# Altium PCB DSP_Control.PcbDoc (part 1 of 2)
Units mm, origin at the board's own origin, x right, y up, seen from the top; angles counter-clockwise.
Board outline 100 x 70 mm, 4 copper layers (Top Layer, GND, PWR, Bottom Layer), stack 0.603 mm thick; 225 components, 118 nets, 552 pads, 173 vias.
Unrouted connection lines stored in the file: 3.
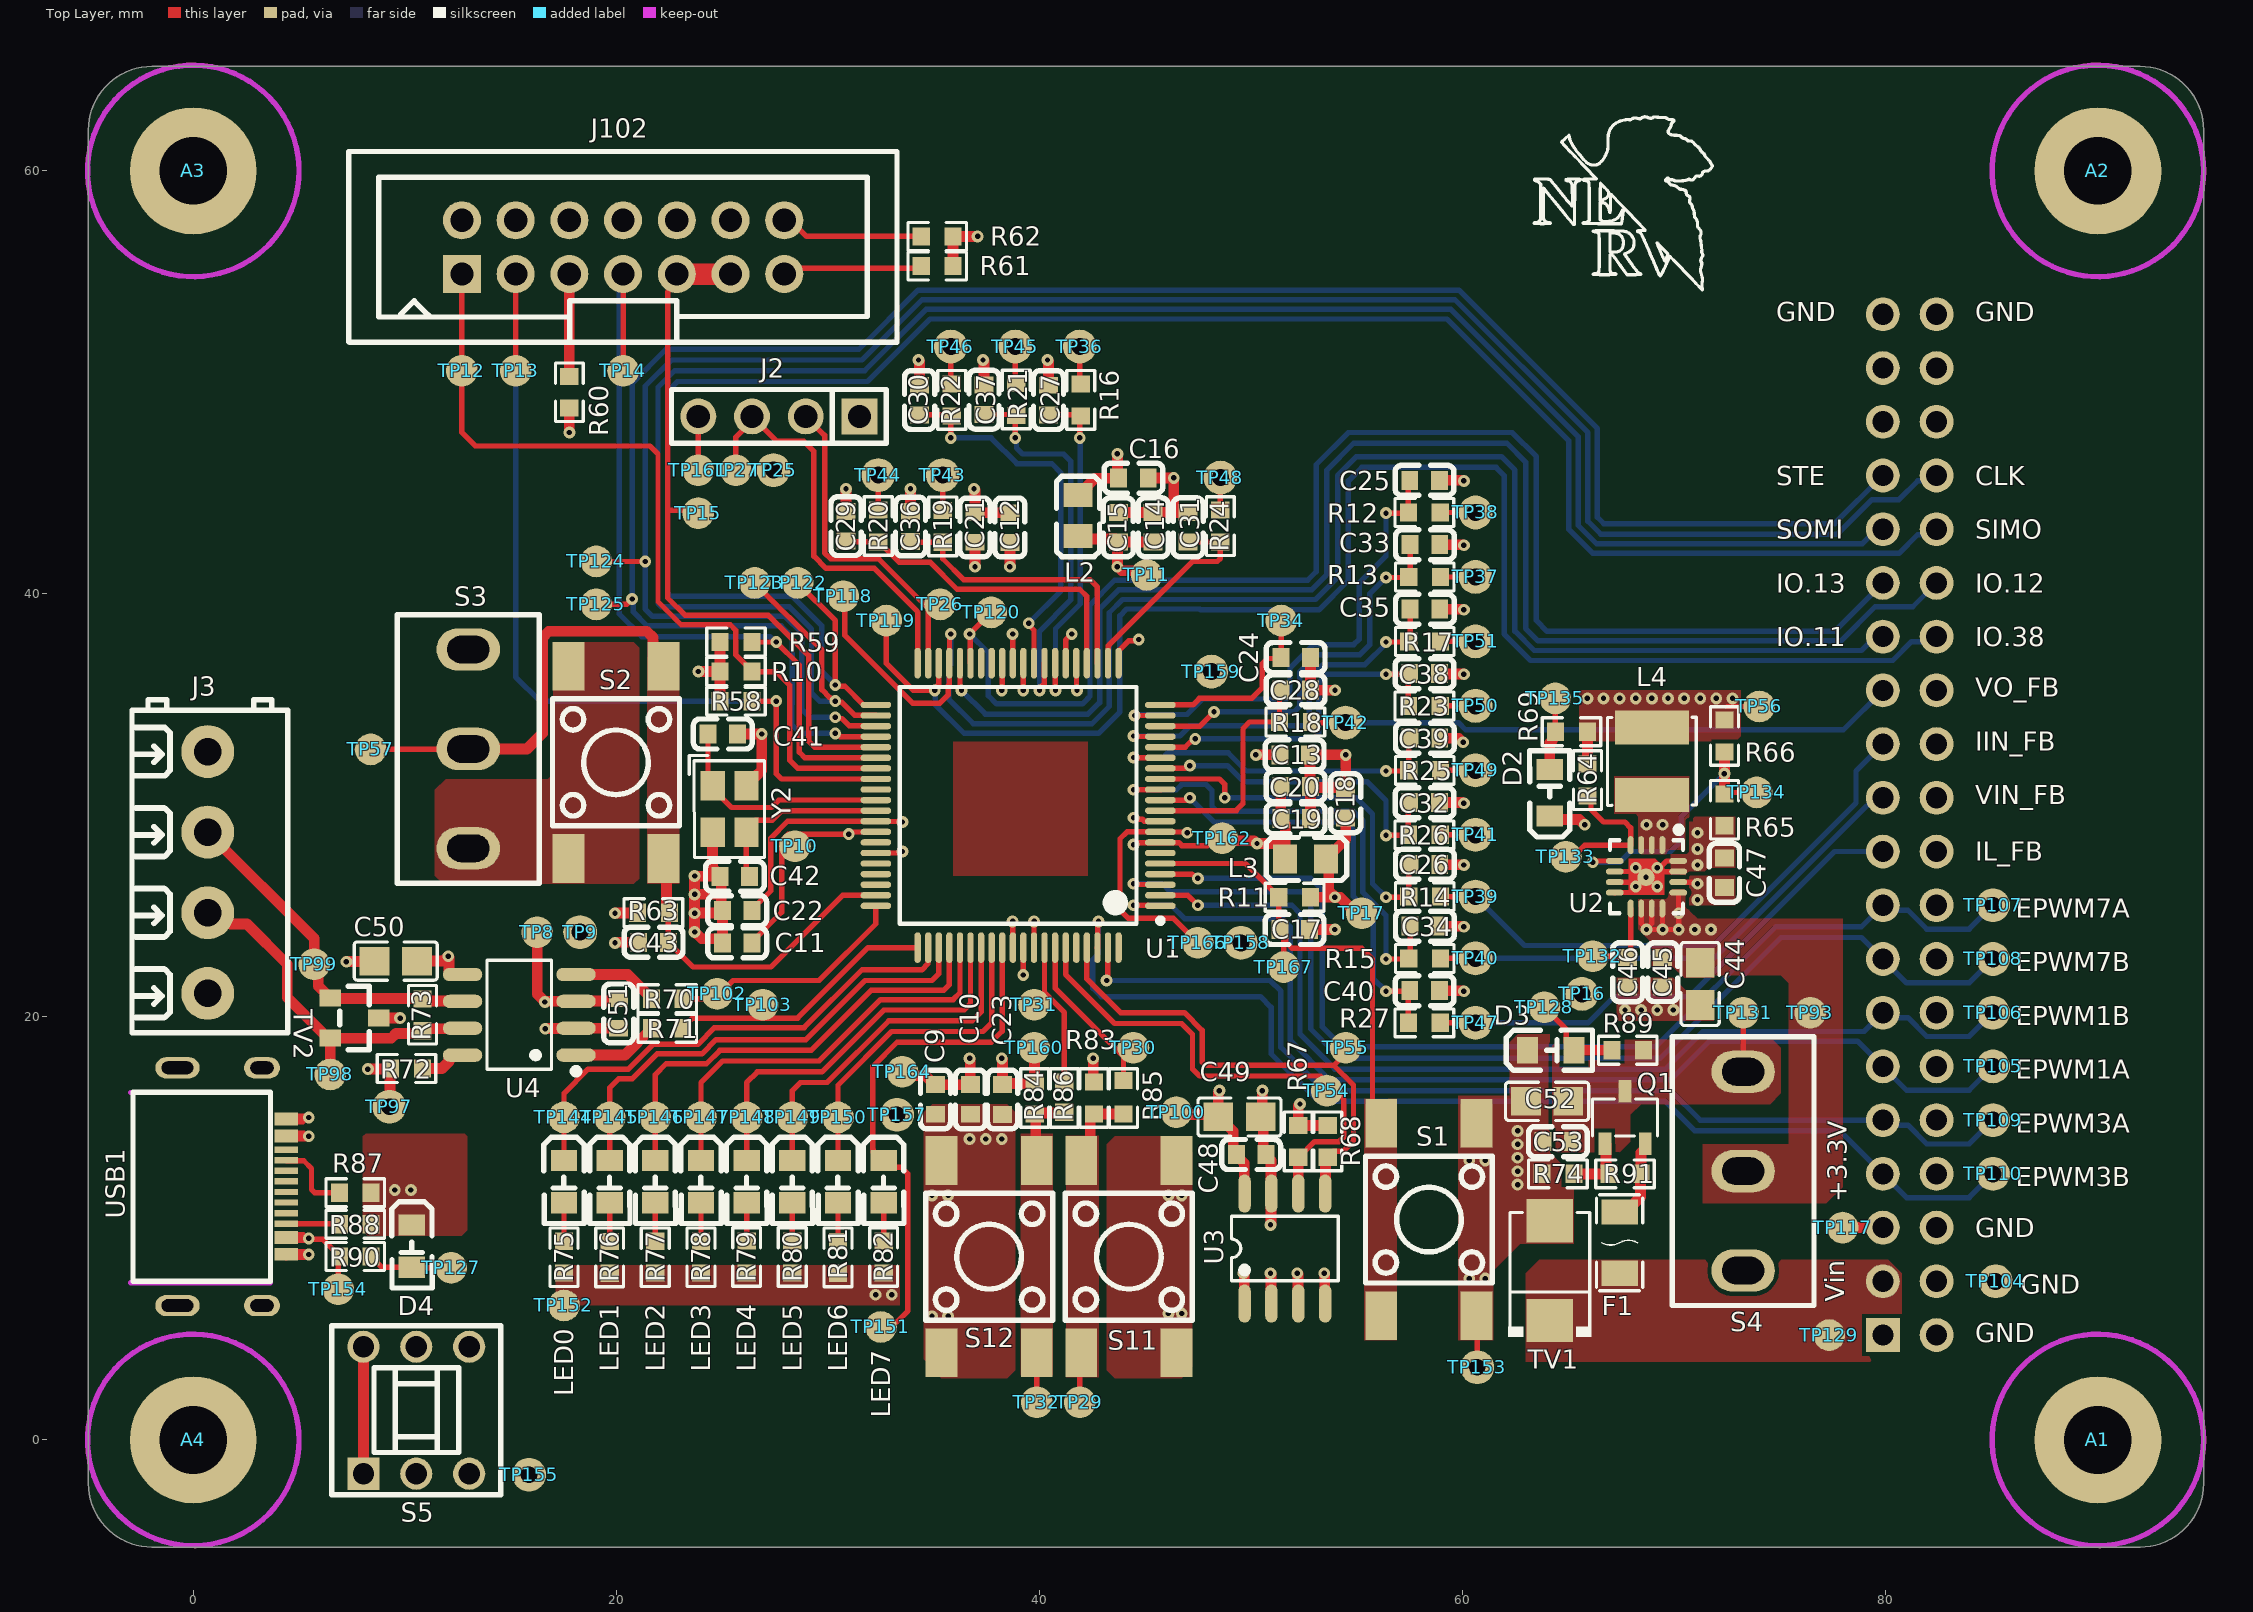
[diagram p0: Top Layer view]
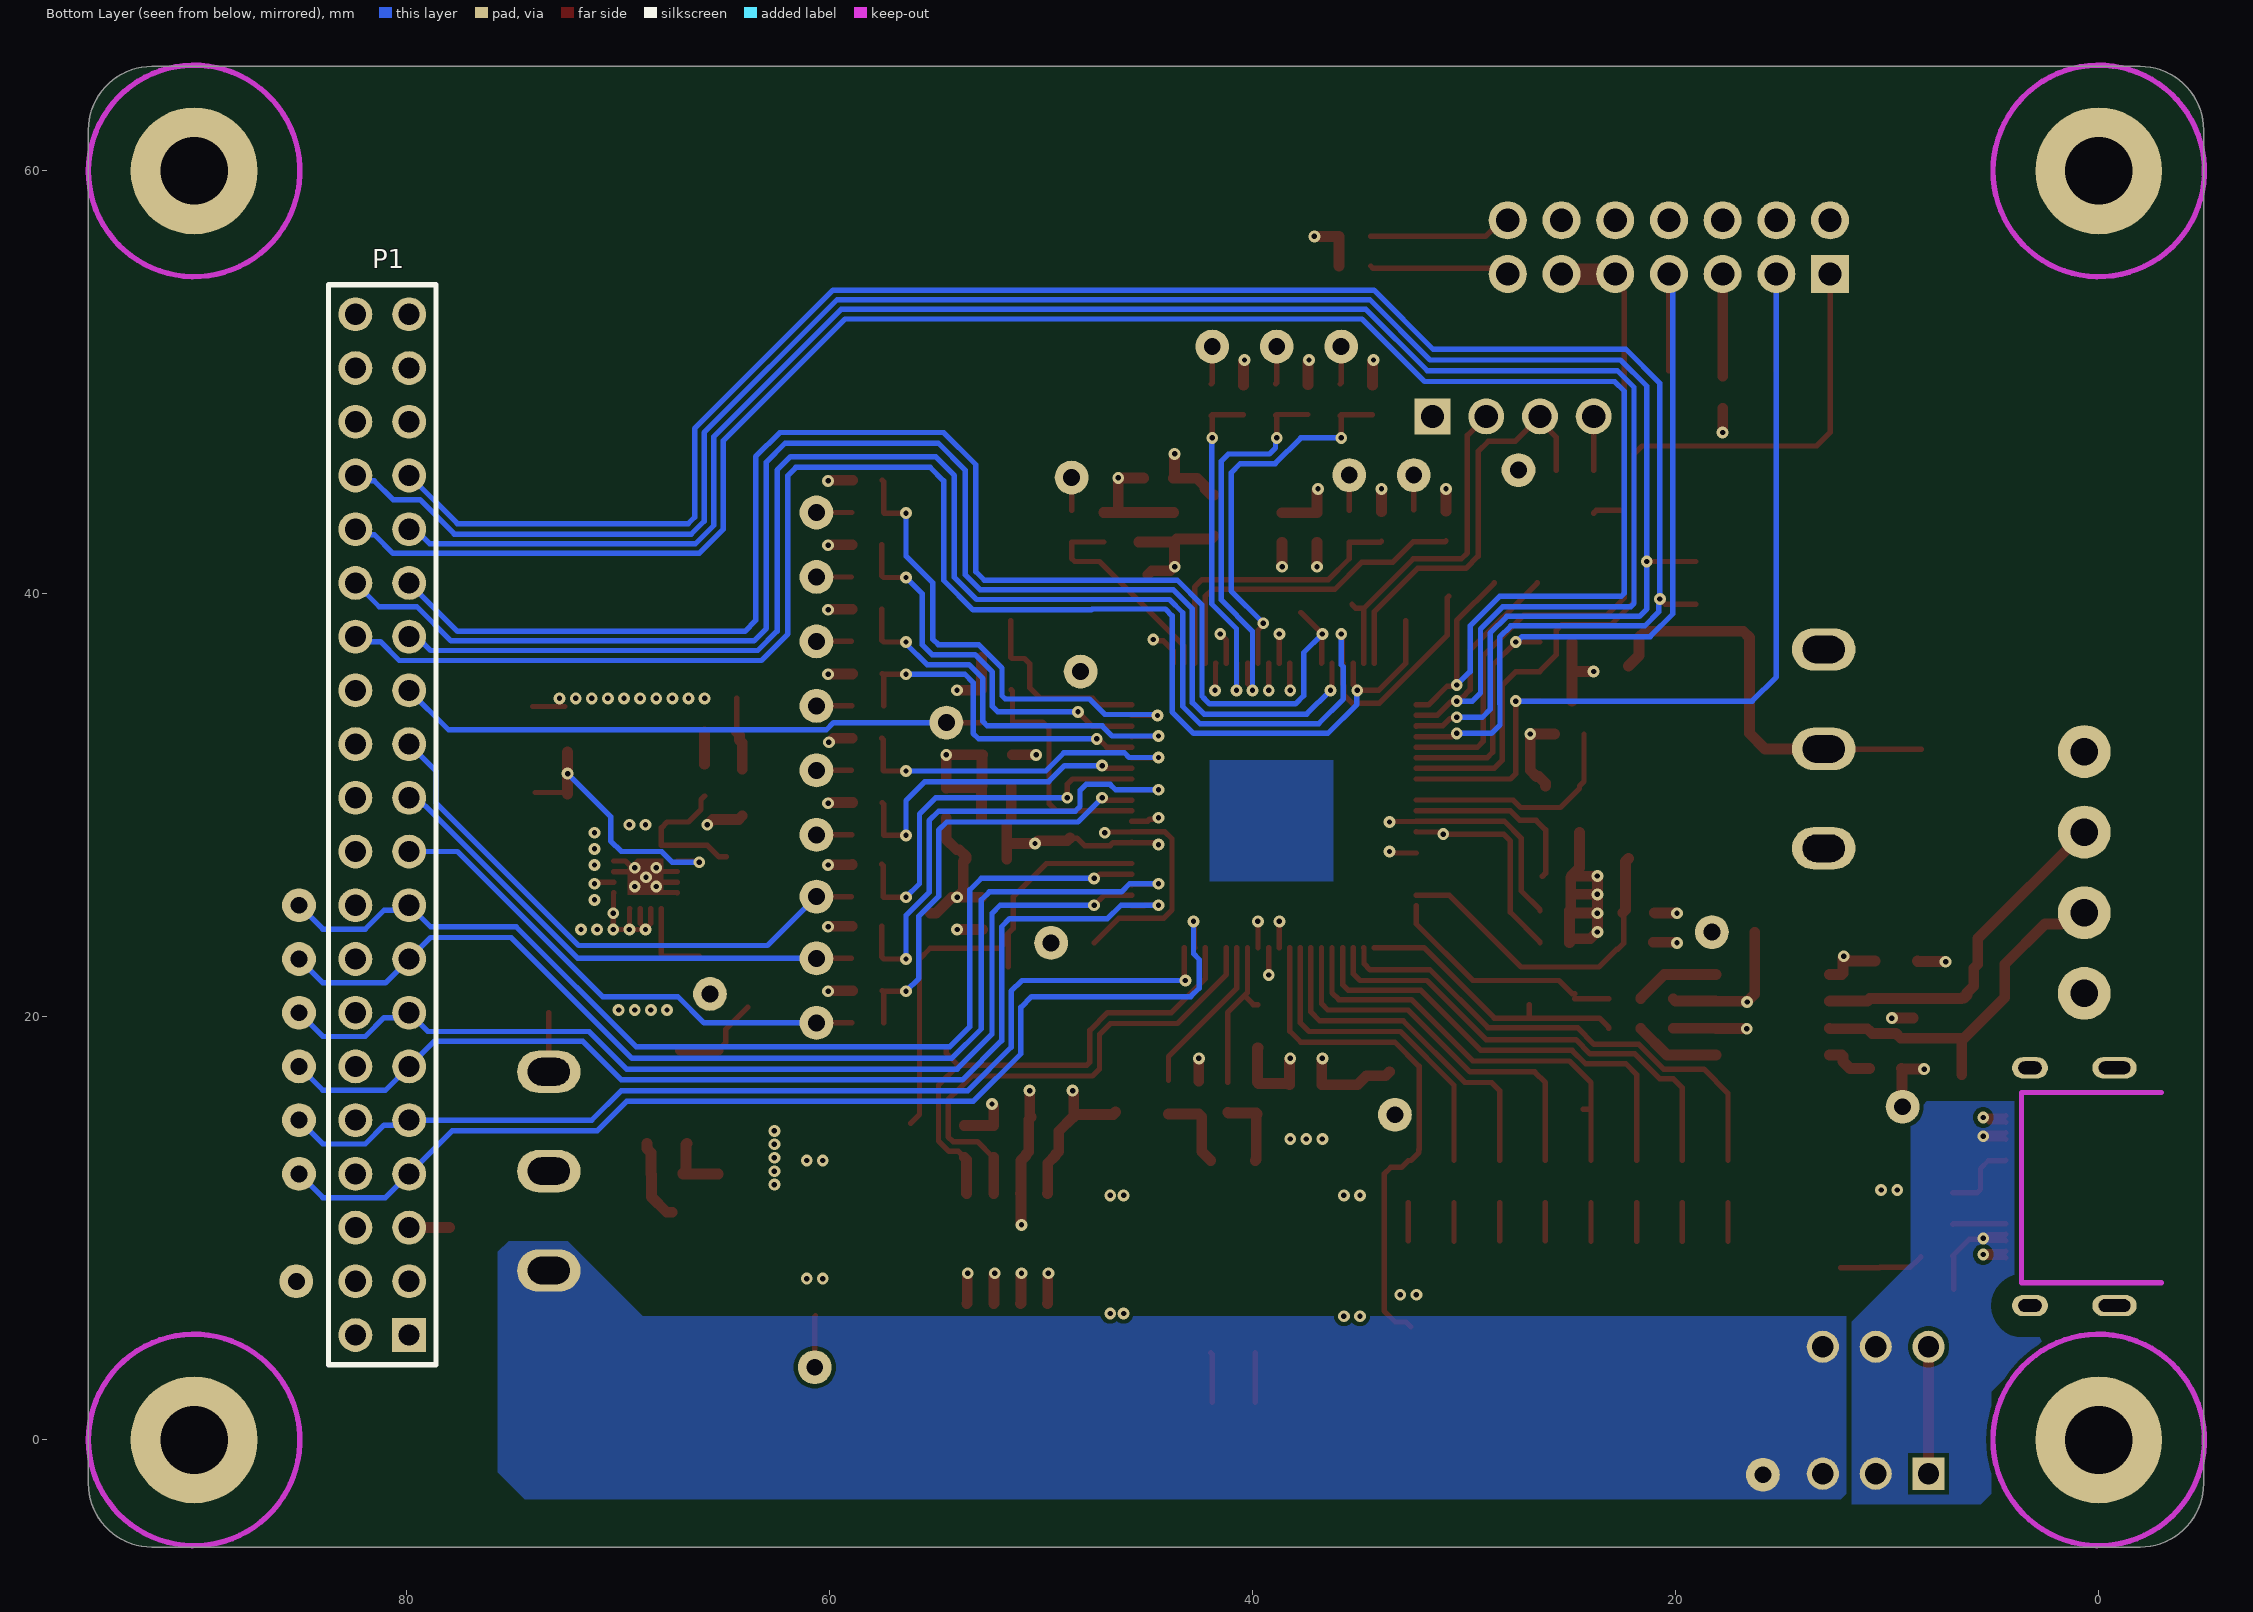
[diagram p1: Bottom Layer view, seen from below]
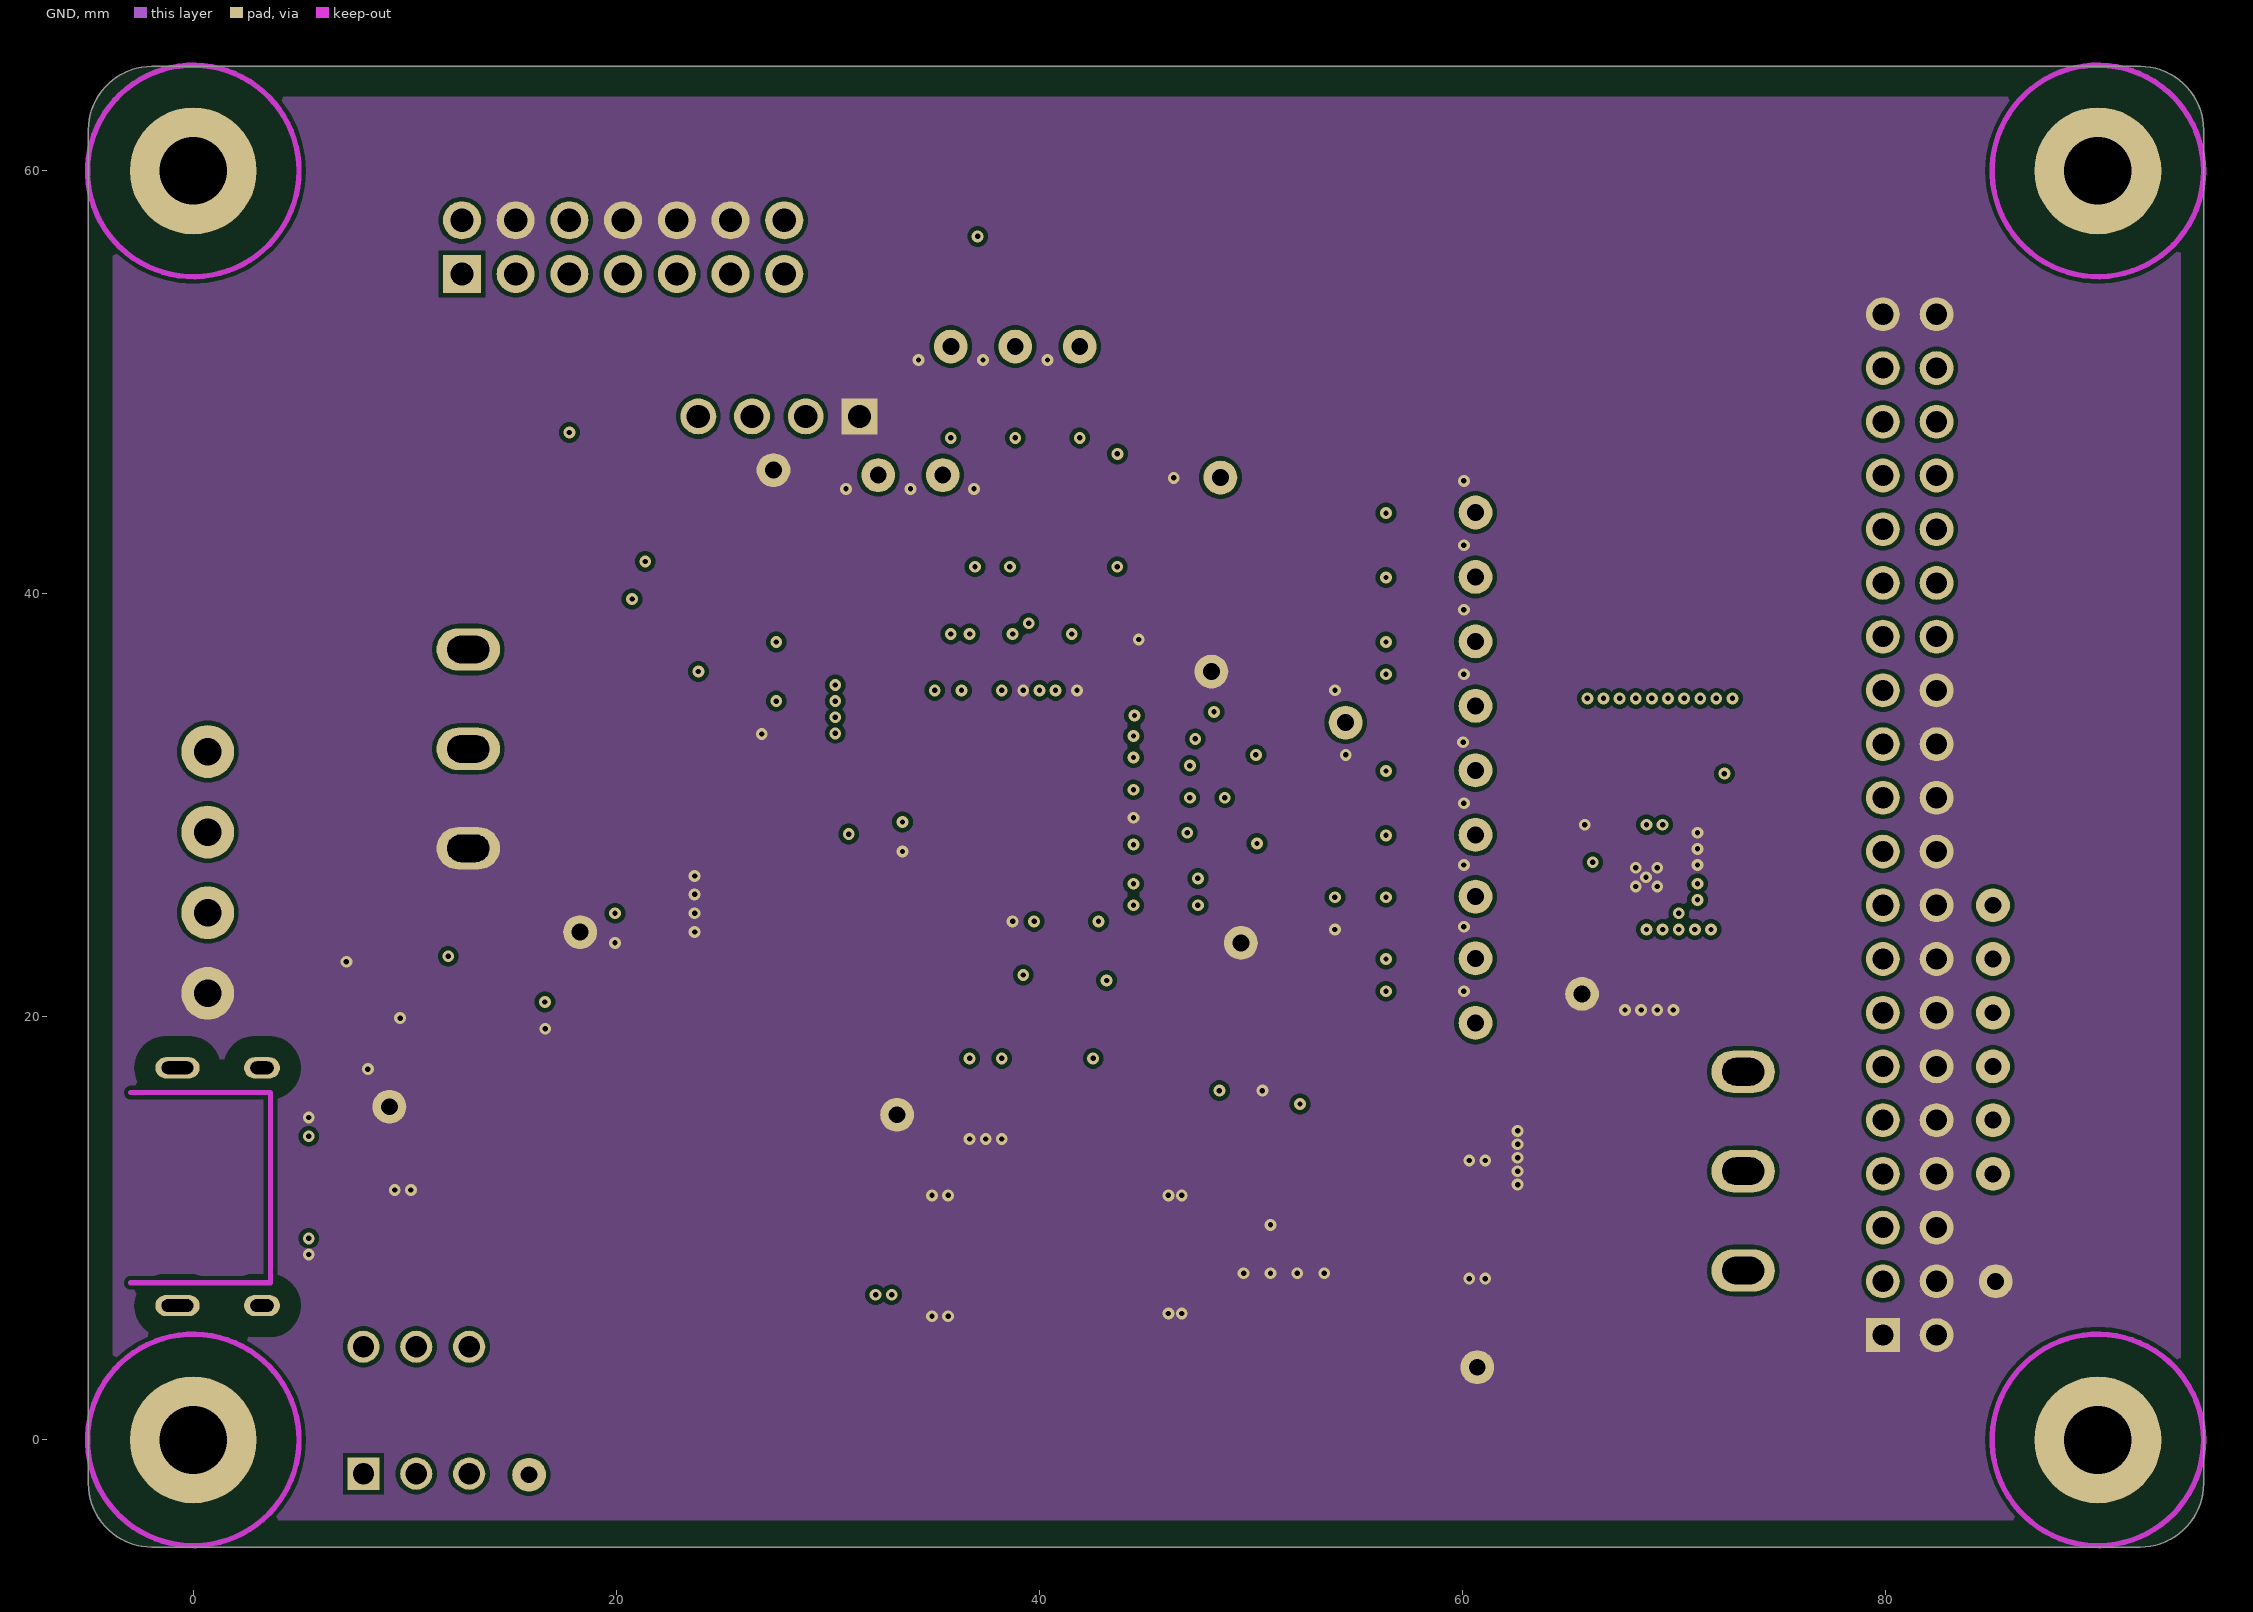
[diagram p2: GND]
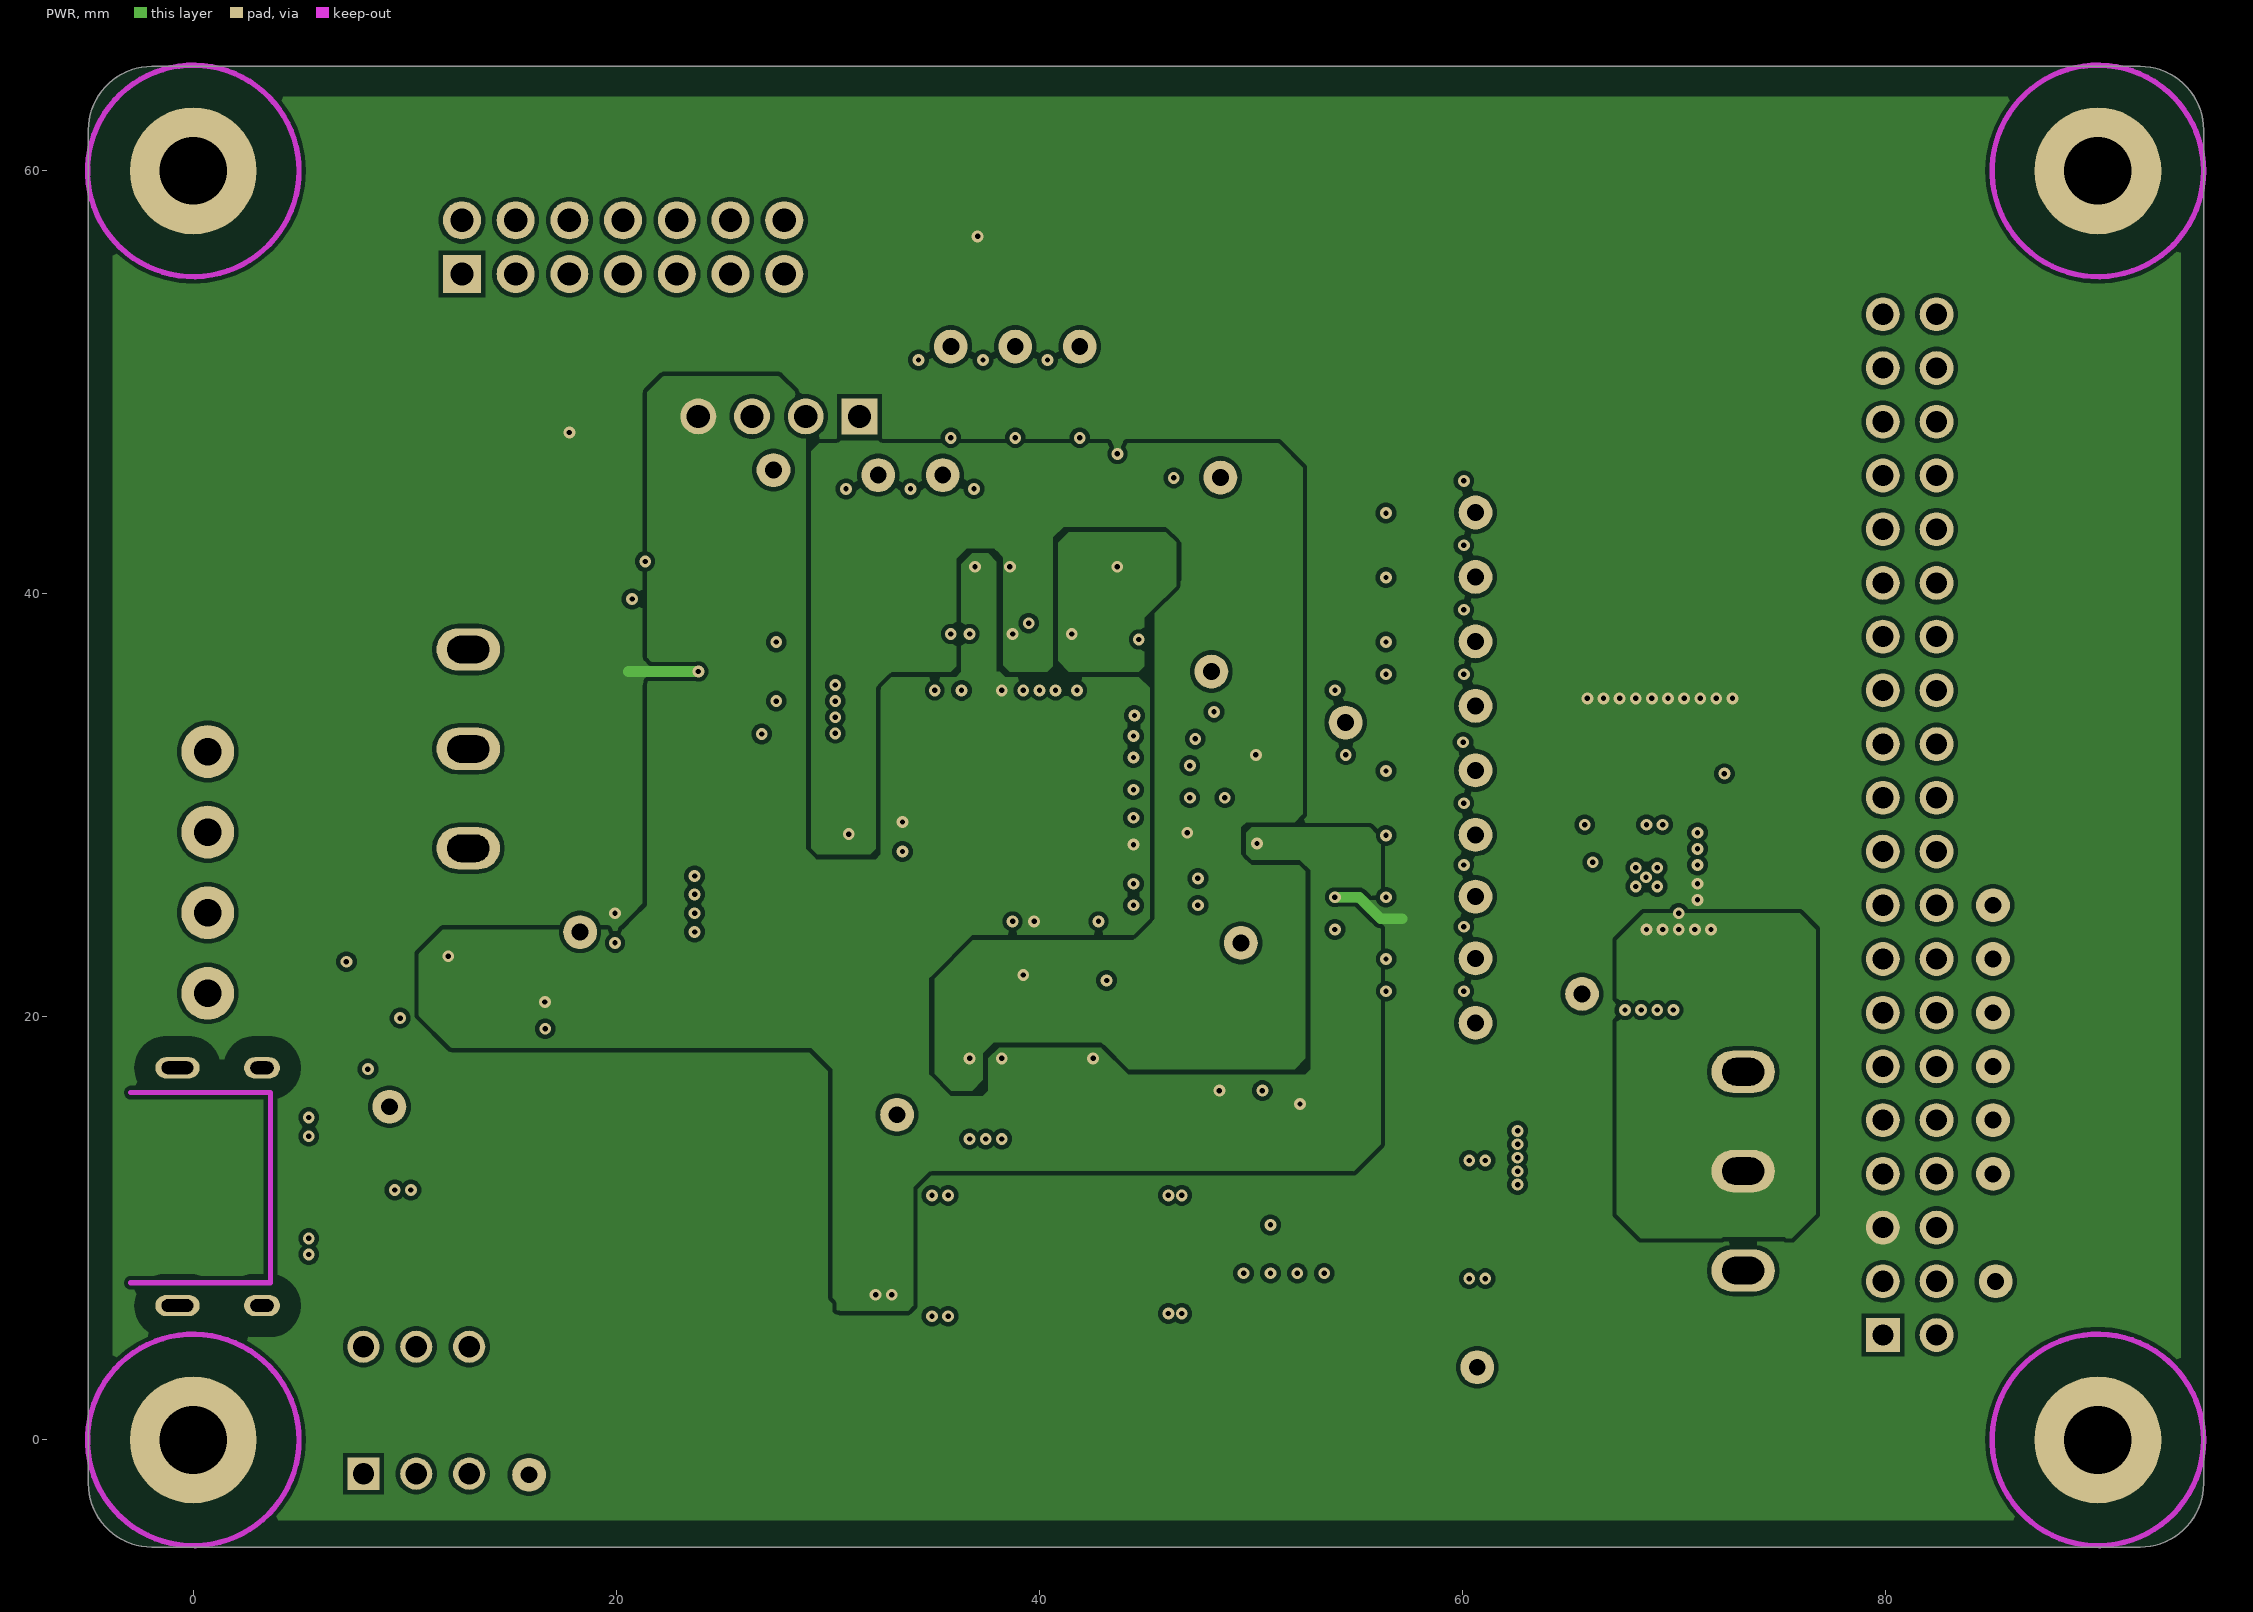
[diagram p3: PWR]
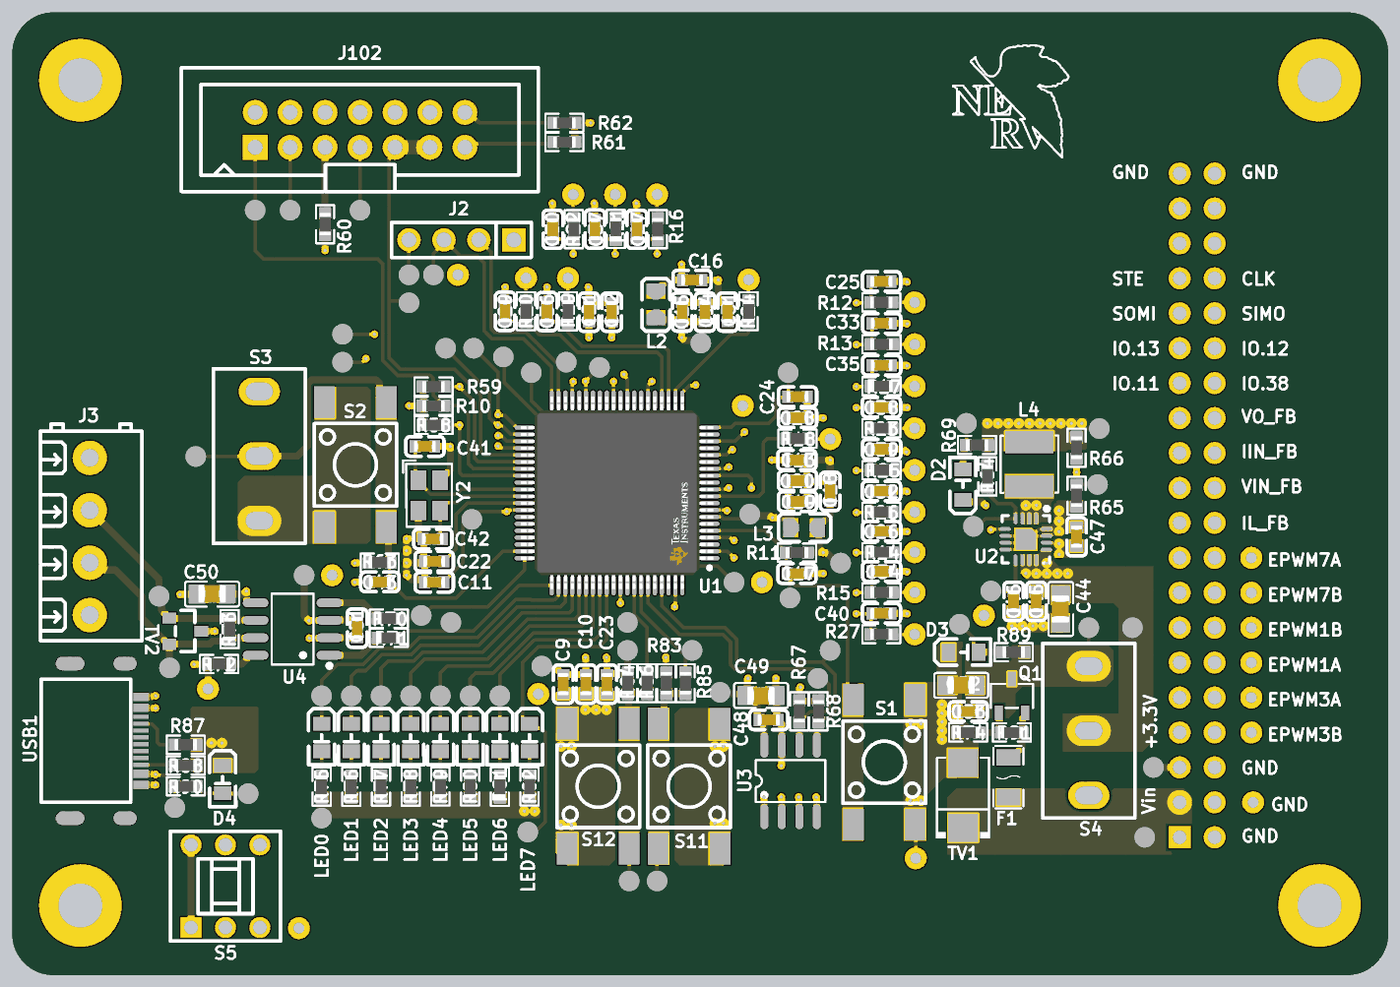
[diagram p5: 3D render of the assembled board from above, using the file's embedded part models]

## Layer stack, top to bottom
Top Solder: solder mask 0.0102, Solder Resist, Dk 3.5
Top Layer: signal copper 0.0356
Dielectric 2: prepreg 0.0711, PP-006, Dk 4.1
GND: signal copper 0.035
Dielectric 1: dielectric 0.32, FR-4, Dk 4.8
PWR: signal copper 0.035
Dielectric 3: prepreg 0.0711, PP-006, Dk 4.1
Bottom Layer: signal copper 0.0356
Bottom Solder: solder mask 0.0102, Solder Resist, Dk 3.5

## Board outline
-4.954,-2.064 -4.954,61.936 cw(c-1.954,61.936) -1.954,64.936 92.046,64.936 cw(c92.046,61.936) 95.046,61.936 95.046,-2.064 cw(c92.046,-2.064) 92.046,-5.064 -1.954,-5.064 cw(c-1.954,-2.064)

## Design rules (kind name [scope] priority, off if disabled: settings)
Clearance Clearance_1 [InNet('EH') vs InNetClass('All Nets')] p1: gap=1 ignorepadtopadclearanceinfootprint=FALSE
Clearance [All] p2: gap=0.2 ignorepadtopadclearanceinfootprint=FALSE
MinimumSolderMaskSliver [All] p1 off: minsoldermaskwidth=0.254
PolygonConnect [All] p1: connectstyle=Direct reliefconductorwidth=0.254 reliefentries=4 polygonreliefangle="90 Angle" airgapwidth=0.254
RoutingVias [All] p1: holewidth=0.711 width=1.27 viastyle="Through Hole" minholewidth=0.711 minwidth=1.27 maxholewidth=0.711 maxwidth=1.27
SilkToSilkClearance [All] p1 off: silktosilkclearance=0.254
SilkToSolderMaskClearance [IsPad] p1 off: minsilkscreentomaskgap=0.254 clearancetoexposedcopper=TRUE
SolderMaskExpansion [All] p1: expansion=0.102 istentingtop=FALSE
SupplyNets "Schematic Supply Nets_4" [InNet('VDDIO')] p1: voltage=0.000
SupplyNets "Schematic Supply Nets_3" [InNet('GND')] p2: voltage=0.000
SupplyNets "Schematic Supply Nets_2" [InNet('VDDA')] p3: voltage=0.000
SupplyNets "Schematic Supply Nets_1" [InNet('VDD')] p4: voltage=0.000
SupplyNets "Schematic Supply Nets" [InNet('+3V3')] p5: voltage=0.000
Width [All] p1: maxlimit=10 minlimit=0.2 preferedwidth=0.2
27 further rules are at their usual default settings.

## Classes and differential pairs
component class sys-part2: A1 A2 A3 A4 C44 C45 C46 C47 C50 C51 C52 C53 D2 D3 D4 EPWM-3B F1 J3 L4 LED0 LED1 LED2 LED3 LED4 LED5 LED6 LED7 P1 Q1 R64 R65 R66 R69 R70 R71 R72 R73 R74 R75 R76 R77 R78 R79 R80 R81 R82 R87 R88 R89 R90 R91 S4 S5 TP93 TP97 TP98 TP99 TP100 TP102 TP103 TP104 TP105 TP106 TP107 TP108 TP109 TP110 TP117 TP118 TP119 TP120 TP122 TP123 TP124 TP125 TP127 TP128 TP129 TP131 TP132 TP133 TP134 TP135 TP144 TP145 TP146 TP147 TP148 TP149 TP150 TP151 TP152 TP153 TP154 TP155 TV1 TV2 U2 U4 USB1
component class F280025C_min_sys: C9 C10 C11 C12 C13 C14 C15 C16 C17 C18 C19 C20 C21 C22 C23 C24 C25 C26 C27 C28 C29 C30 C31 C32 C33 C34 C35 C36 C37 C38 C39 C40 C41 C42 C43 C48 C49 J2 J102 L2 L3 R10 R11 R12 R13 R14 R15 R16 R17 R18 R19 R20 R21 R22 R23 R24 R25 R26 R27 R36 R37 R58 R59 R60 R61 R62 R63 R67 R68 R83 R84 R85 R86 S1 S2 S3 S11 S12 TP8 TP9 TP10 TP11 TP12 TP13 TP14 TP15 TP16 TP17 TP25 TP26 TP27 TP29 TP30 TP31 TP32 TP34 TP36 TP37 TP38 TP39 TP40 TP41 TP42 TP43 TP44 TP45 TP46 TP47 TP48 TP49 TP50 TP51 TP54 TP55 TP56 TP57 TP157 TP158 TP159 TP160 TP161 TP162 TP164 TP166 TP167 U1 U3 Y2

## Components (designator, comment, footprint, x,y, rotation, side; value= is the part's Value field where it differs from the comment)
A1 "PAD-3.2/6.0" PAD-3.2/6.0#1 83.869,-5 r0 top
A2 "PAD-3.2/6.0" PAD-3.2/6.0#2 83.869,65 r0 top
A3 "PAD-3.2/6.0" PAD-3.2/6.0#3 -1,51.849 r0 top
A4 "PAD-3.2/6.0" PAD-3.2/6.0#4 -6.174,-5.428 r0 top
C9 "10V/10uF" C0603 35.091,16.096 r90 top
C10 "50V/0.1uF" C0603 36.742,16.096 r90 top
C11 "50V/0.1uF" C0603 25.718,23.5 r0 top
C12 "50V/0.1uF" C0603 38.611,43.139 r270 top
C13 "50V/0.1uF" C0603 52.073,32.39 r180 top
C14 "50V/0.1uF" C0603 45.388,43.149 r90 top
C15 "10V/2.2uF" C0603 43.737,43.149 r90 top
C16 "10V/2.2uF" C0603 44.453,45.471 r0 top
C17 "50V/0.1uF" C0603 52.073,24.135 r0 top
C18 "10V/10uF" C0603 54.486,30.104 r90 top
C19 "10V/10uF" C0603 52.119,29.37 r0 top
C20 "50V/0.1uF" C0603 52.119,30.894 r0 top
C21 "50V/0.1uF" C0603 36.96,43.139 r90 top
C22 "50V/0.1uF" C0603 25.718,25.024 r180 top
C23 "50V/0.1uF" C0603 38.266,16.096 r270 top
C24 "10V/2.2uF" C0603 52.119,36.99 r0 top
C25 "50V/100pF" C0603 58.215,45.372 r0 top
C26 "50V/100pF" C0603 58.233,27.211 r0 top
C27 "50V/100pF" C0603 40.435,49.164 r90 top
C28 "50V/100pF" C0603 52.119,35.466 r0 top
C29 "50V/100pF" C0603 30.864,43.203 r90 top
C30 "50V/100pF" C0603 34.339,49.164 r90 top
C31 "50V/100pF" C0603 47.039,43.149 r90 top
C32 "50V/100pF" C0603 58.215,30.132 r0 top
C33 "50V/100pF" C0603 58.233,42.324 r0 top
C34 "50V/100pF" C0603 58.233,24.29 r0 top
C35 "50V/100pF" C0603 58.233,39.276 r0 top
C36 "50V/100pF" C0603 33.912,43.185 r90 top
C37 "50V/100pF" C0603 37.387,49.182 r90 top
C38 "50V/100pF" C0603 58.215,36.228 r0 top
C39 "50V/100pF" C0603 58.233,33.18 r0 top
C40 "50V/100pF" C0603 58.215,21.242 r0 top
C41 "50V/10pF" C0603 25.037,33.378 r0 top
C42 "50V/10pF" C0603 25.608,26.647 r180 top
C43 "50V/1nF" C0603 21.766,23.528 r180 top
C44 "50V/10uF" C0805 71.25,21.559 r270 top
C45 "50V/0.1uF" C0603 69.472,22.116 r270 top
C46 "50V/3.3nF" C0603 67.821,22.113 r90 top
C47 "10V/22uF" C0603 72.393,26.815 r90 top
C48 "50V/0.1uF" C0603 50.021,13.495 r0 top
C49 "50V/2.2uF" C0805 49.467,15.268 r0 top
C50 "50V/2.2uF" C0805 9.574,22.639 r180 top
C51 "50V/0.1uF" C0603 20.115,20.165 r270 top
C52 "25V/22uF" C0805 64.011,16.007 r180 top
C53 "50V/0.1uF" C0603 64.519,14.102 r180 top
D2 "ncd0805c1" LED0805-RD 64.138,30.604 r90 top
D3 "ncd0805c1" LED0805-RD 64.181,18.42 r0 top
D4 "xl-2012surc" LED0805-RD_RED 10.336,9.159 r270 top
F1 "nsmd050-24v" F1206 67.44,9.324 r90 top
J2 "pz254v-11-04p" HDR-TH_4P-P2.54-V-M 27.689,48.392 r180 top
J3 "db125-3.81-4p-gn-s" CONN-TH_DB125-3.81-4P 0.681,26.83 r90 top
J102 "2.54-2*7p简牛" IDC-TH_14P-P2.54-V-R2-C7-S2.54 20.323,56.393 r0 top
L2 "60Ω@100MHz" L0805 41.832,43.706 r90 top value="60 ohm"
L3 "220Ω/100 MHz" L0805 52.594,27.465 r180 top value="220 ohm"
L4 "fhd4020s-3r3mt" IND-SMD_L4.0-W4.0 68.964,32.085 r90 top value=3.3uH
LED0 "xl-2012surc" LED0805-RD_RED 17.529,12.212 r270 top
LED1 "xl-2012surc" LED0805-RD_RED 19.688,12.212 r270 top
LED2 "xl-2012surc" LED0805-RD_RED 21.847,12.212 r270 top
LED3 "xl-2012surc" LED0805-RD_RED 24.006,12.212 r270 top
LED4 "xl-2012surc" LED0805-RD_RED 26.165,12.212 r270 top
LED5 "xl-2012surc" LED0805-RD_RED 28.324,12.212 r270 top
LED6 "xl-2012surc" LED0805-RD_RED 30.483,12.212 r270 top
LED7 "xl-2012surc" LED0805-RD_RED 32.642,12.212 r270 top
P1 "zx-pm2.54-2-20py" HDR-TH_40P-P2.54-V-F-R2-C20-S2.54 81.156,29.088 r90 bottom
Q1 "ao3407a_c15155" SOT-23-3_L2.9-W1.6-P1.90-LS2.8-BR 67.694,15.245 r270 top
R10 "2.2k" R0603#1 25.665,36.327 r180 top
R11 "2.2k" R0603#1 52.073,25.659 r0 top
R12 "22Ω" R0603#1 58.205,43.848 r0 top
R13 "22Ω" R0603#1 58.223,40.8 r0 top
R14 "22Ω" R0603#1 58.223,25.687 r0 top
R15 "22Ω" R0603#1 58.223,22.766 r0 top
R16 "22Ω" R0603#1 41.959,49.172 r90 top
R17 "22Ω" R0603#1 58.223,37.752 r0 top
R18 "22Ω" R0603#1 52.109,33.942 r0 top
R19 "22Ω" R0603#1 35.436,43.193 r90 top
R20 "22Ω" R0603#1 32.388,43.21 r90 top
R21 "22Ω" R0603#1 38.911,49.19 r90 top
R22 "22Ω" R0603#1 35.863,49.172 r90 top
R23 "22Ω" R0603#1 58.205,34.704 r0 top
R24 "22Ω" R0603#1 48.563,43.203 r90 top
R25 "22Ω" R0603#1 58.223,31.656 r0 top
R26 "22Ω" R0603#1 58.205,28.608 r0 top
R27 "22Ω" R0603#1 58.205,19.718 r0 top
R58 "10k" R0603#1 25.665,34.93 r180 top
R59 "10k" R0603#1 25.665,37.724 r180 top
R60 "100Ω" R0603#1 17.783,49.535 r270 top
R61 "4.7k" R0603#1 35.172,55.504 r0 top
R62 "4.7k" R0603#1 35.174,56.901 r180 top
R63 "10k" R0603#1 21.758,24.925 r180 top
R64 "100k" R0603#1 65.916,31.196 r90 top
R65 "5.1k" R0603#1 72.393,29.789 r90 top
R66 "16k" R0603#1 72.393,33.279 r90 top
R67 "4.7k" R0603#1 52.246,14.117 r270 top
R68 "4.7k" R0603#1 53.643,14.117 r270 top
R69 "1k" R0603#1 65.162,33.482 r0 top
R70 "22Ω" R0603#1 22.409,20.861 r0 top
R71 "22Ω" R0603#1 22.409,19.464 r0 top
R72 "10k" R0603#1 10.082,17.559 r180 top
R73 "120Ω" R0603#1 10.844,20.099 r270 top
R74 "100k" R0603#1 64.519,12.578 r0 top
R75 "1k" R0603#1 17.529,8.641 r270 top
R76 "1k" R0603#1 19.688,8.633 r270 top
R77 "1k" R0603#1 21.847,8.641 r270 top
R78 "1k" R0603#1 24.006,8.641 r270 top
R79 "1k" R0603#1 26.165,8.651 r270 top
R80 "1k" R0603#1 28.324,8.651 r270 top
R81 "1k" R0603#1 30.483,8.633 r270 top
R82 "1k" R0603#1 32.642,8.651 r270 top
R83 "10k" R0603#1 42.584,16.164 r90 top
R84 "10k" R0603#1 39.79,16.164 r90 top
R85 "1k" R0603#2 43.981,16.164 r90 top
R86 "1k" R0603#3 41.187,16.167 r270 top
R87 "5.1k" R0603#1 7.659,11.689 r0 top
R88 "5.1k" R0603#1 7.661,10.193 r180 top
R89 "4.3k" R0603#1 67.821,18.42 r0 top
R90 "2k" R0603#1 7.661,8.669 r180 top
R91 "1Meg" R0603#1 67.694,12.578 r0 top
S1 "kh-6x6x5h-stm" SW-SMD_4P-L6.0-W6.0-P4.50-LS9.0_H5.0 58.423,10.419 r270 top
S2 "kh-6x6x5h-stm" SW-SMD_4P-L6.0-W6.0-P4.50-LS9.0_H5.0 19.988,32.037 r270 top
S3 "ss-12d10l5" SW-TH_SS-12D10L5 13.003,32.672 r270 top
S4 "ss-12d10l5" SW-TH_SS-12D10L5 73.282,12.705 r270 top
S5 "xkb8080-z" SW-TH_6P-L8.0-W8.0-P2.50 10.544,1.402 r0 top
S11 "kh-6x6x5h-stm" SW-SMD_4P-L6.0-W6.0-P4.50-LS9.0_H5.0 44.235,8.664 r90 top
S12 "kh-6x6x5h-stm" SW-SMD_4P-L6.0-W6.0-P4.50-LS9.0_H5.0 37.631,8.664 r270 top
TP8 "TEST POINT" TP-1.5 16.259,24.008 r0 top
TP9 "TP-pad0.8" PAD0.8/1.6 18.291,24.008 r0 top
TP10 "TEST POINT" TP-1.5 28.451,28.072 r90 top
TP11 "TEST POINT" TP-1.5 45.085,40.894 r0 top
TP12 "TEST POINT" TP-1.5 12.703,50.551 r90 top
TP13 "TEST POINT" TP-1.5 15.243,50.551 r90 top
TP14 "TEST POINT" TP-1.5 20.323,50.551 r90 top
TP15 "TEST POINT" TP-1.5 23.879,43.82 r90 top
TP16 "TP-pad0.8" PAD0.8/1.6 65.662,21.087 r90 top
TP17 "TEST POINT" TP-1.5 55.248,24.897 r90 top
TP25 "TP-pad0.8" PAD0.8/1.6 27.435,45.852 r90 top
TP26 "TEST POINT" TP-1.5 35.309,39.502 r90 top
TP27 "TEST POINT" TP-1.5 25.657,45.852 r90 top
TP29 "TEST POINT" TP-1.5 41.913,1.783 r90 top
TP30 "TEST POINT" TP-1.5 44.453,18.547 r90 top
TP31 "TEST POINT" TP-1.5 39.754,20.579 r90 top
TP32 "TEST POINT" TP-1.5 39.881,1.783 r90 top
TP34 "TEST POINT" TP-1.5 51.438,38.74 r90 top
TP36 "TP-pad0.8" PAD0.8/1.6 41.913,51.694 r90 top
TP37 "TP-pad0.8" PAD0.8/1.6 60.628,40.8 r90 top
TP38 "TP-pad0.8" PAD0.8/1.6 60.628,43.848 r90 top
TP39 "TP-pad0.8" PAD0.8/1.6 60.628,25.687 r90 top
TP40 "TP-pad0.8" PAD0.8/1.6 60.628,22.766 r90 top
TP41 "TP-pad0.8" PAD0.8/1.6 60.628,28.608 r90 top
TP42 "TP-pad0.8" PAD0.8/1.6 54.486,33.914 r90 top
TP43 "TP-pad0.8" PAD0.8/1.6 35.436,45.616 r90 top
TP44 "TP-pad0.8" PAD0.8/1.6 32.388,45.616 r90 top
TP45 "TP-pad0.8" PAD0.8/1.6 38.865,51.694 r90 top
TP46 "TP-pad0.8" PAD0.8/1.6 35.817,51.694 r90 top
TP47 "TP-pad0.8" PAD0.8/1.6 60.628,19.718 r90 top
TP48 "TP-pad0.8" PAD0.8/1.6 48.563,45.499 r90 top
TP49 "TP-pad0.8" PAD0.8/1.6 60.628,31.656 r90 top
TP50 "TP-pad0.8" PAD0.8/1.6 60.628,34.704 r90 top
TP51 "TP-pad0.8" PAD0.8/1.6 60.628,37.752 r90 top
TP54 "TEST POINT" TP-1.5 53.597,16.515 r90 top
TP55 "TEST POINT" TP-1.5 54.486,18.547 r90 top
TP56 "TEST POINT" TP-1.5 74.044,34.676 r90 top
TP57 "TEST POINT" TP-1.5 8.385,32.644 r90 top
TP93 "TEST POINT" TP-1.5 76.457,20.198 r90 top
TP97 "TP-pad0.8" PAD0.8/1.6 9.274,15.753 r90 top
TP98 "TEST POINT" TP-1.5 6.48,17.277 r90 top
TP99 "TEST POINT" TP-1.5 5.718,22.484 r90 top
TP100 "TEST POINT" TP-1.5 46.485,15.499 r90 top
TP102 "TEST POINT" TP-1.5 24.768,21.087 r90 top
TP103 "TEST POINT" TP-1.5 26.927,20.579 r90 top
TP104 "TP-pad0.8" PAD0.8/1.6 85.22,7.498 r90 top
TP105 "TP-pad0.8" PAD0.8/1.6 85.093,17.658 r90 top
TP106 "TP-pad0.8" PAD0.8/1.6 85.093,20.198 r90 top
TP107 "TP-pad0.8" PAD0.8/1.6 85.093,25.278 r90 top
TP108 "TP-pad0.8" PAD0.8/1.6 85.093,22.738 r90 top
TP109 "TP-pad0.8" PAD0.8/1.6 85.093,15.118 r90 top
TP110 "TP-pad0.8" PAD0.8/1.6 85.093,12.578 r90 top
TP117 "TEST POINT" TP-1.5 77.981,10.038 r90 top
TP118 "TEST POINT" TP-1.5 30.737,39.883 r90 top
TP119 "TEST POINT" TP-1.5 32.769,38.74 r90 top
TP120 "TEST POINT" TP-1.5 37.722,39.121 r90 top
TP122 "TEST POINT" TP-1.5 28.578,40.518 r90 top
TP123 "TEST POINT" TP-1.5 26.546,40.518 r90 top
TP124 "TEST POINT" TP-1.5 19.053,41.534 r90 top
TP125 "TEST POINT" TP-1.5 19.053,39.502 r90 top
TP127 "TEST POINT" TP-1.5 12.195,8.133 r90 top
TP128 "TEST POINT" TP-1.5 63.884,20.452 r90 top
TP129 "TEST POINT" TP-1.5 77.346,4.958 r90 top
TP131 "TEST POINT" TP-1.5 73.282,20.198 r90 top
TP132 "TEST POINT" TP-1.5 66.17,22.865 r90 top
TP133 "TEST POINT" TP-1.5 64.9,27.564 r90 top
TP134 "TEST POINT" TP-1.5 73.917,30.612 r90 top
TP135 "TEST POINT" TP-1.5 64.392,35.057 r90 top
TP144 "TEST POINT" TP-1.5 17.529,15.245 r90 top
TP145 "TEST POINT" TP-1.5 19.688,15.245 r90 top
TP146 "TEST POINT" TP-1.5 21.847,15.245 r90 top
TP147 "TEST POINT" TP-1.5 24.006,15.245 r90 top
TP148 "TEST POINT" TP-1.5 26.165,15.245 r90 top
TP149 "TEST POINT" TP-1.5 28.324,15.245 r90 top
TP150 "TEST POINT" TP-1.5 30.483,15.245 r90 top
TP151 "TEST POINT" TP-1.5 32.515,5.339 r90 top
TP152 "TEST POINT" TP-1.5 17.529,6.355 r90 top
TP153 "TP-pad0.8" PAD0.8/1.6 60.709,3.434 r90 top
TP154 "TEST POINT" TP-1.5 6.861,7.117 r90 top
TP155 "TP-pad0.8" PAD0.8/1.6 15.878,-1.646 r90 top
TP157 "TP-pad0.8" PAD0.8/1.6 33.277,15.372 r90 top
TP158 "TP-pad0.8" PAD0.8/1.6 49.533,23.5 r90 top
TP159 "TP-pad0.8" PAD0.8/1.6 48.136,36.327 r90 top
TP160 "TEST POINT" TP-1.5 39.754,18.547 r90 top
TP161 "TEST POINT" TP-1.5 23.879,45.852 r90 top
TP162 "TEST POINT" TP-1.5 48.644,28.453 r90 top
TP164 "TEST POINT" TP-1.5 33.531,17.404 r90 top
TP166 "TEST POINT" TP-1.5 47.501,23.5 r90 top
TP167 "TEST POINT" TP-1.5 51.565,22.357 r90 top
TV1 "smbj15a_c83846" SMB_L4.6-W3.6-LS5.3-RD 64.138,8.006 r90 top
TV2 "pesd1can,215" SOT-23_L2.9-W1.3-P1.90-LS2.4-BR 7.623,19.944 r180 top
U1 "TMS320F280025CPNSR" PN0080A-MFG 39,30 r180 top
U2 "tps62130rgtr" QFN-16_L3.0-W3.0-P0.50-TL-EP1.7 68.71,26.624 r270 top
U3 "24lc64t-i/sn" SOIC-8_L4.9-W3.9-P1.27-LS6.0-BL 51.611,9.05 r0 top
U4 "tcan3413dr" SOP-8_L4.9-W3.9-P1.27-LS6.0-BL-1 15.416,20.099 r90 top
USB1 "type-c 16p cb1.6 073" USB-C-SMD_SHOU_TYPE-C-16P-CB1.6 1.827,11.971 r270 top
Y2 "20M" CRYSTAL-SMD_4P-L3.2-W2.5-BL-2 25.354,29.822 r270 top

## Footprints (in the part's own frame and the unit in brackets; to place one, negate y for a bottom-side part, rotate by r counter-clockwise, add the part's x,y. Pads: shape width x height; smd on the part's side, far side on the other; paste and mask are expansions set on the pad)
C0603 [mil]
  rect 31.5x35.4 smd: 1(-27.5,0) 2(27.6,0)
  silkscreen extent -55,-28 55,28, body extent -31,-16 31,16, height 31
C0805 [mil]
  rect 55.5x53.1 smd paste-3937 mask+2: 1(-39.4,0) 2(39.4,0)
  silkscreen extent -77,-36 77,36, body extent -39,-27 39,25, height 51
CONN-TH_DB125-3.81-4P [mm]
  round 2.499 hole 1.3: 1(-5.715,-0.003) 2(-1.905,-0.003) 3(1.905,-0.003) 4(5.715,-0.003)
  silkscreen extent -7.58,-3.79 8.17,3.68
CRYSTAL-SMD_4P-L3.2-W2.5-BL-2 [mil]
  rect 55.1x45.3 smd: 1(-43.3,-31.5) 2(43.3,-31.5) 3(43.3,31.5) 4(-43.3,31.5)
  silkscreen extent -100,-75 90,65
F1206 [mil]
  rect 46.9x68 smd: 1(-56.9,0) 2(56.9,0)
  silkscreen extent -89,-43 89,43
HDR-TH_4P-P2.54-V-M [mm]
  rect 1.699x1.699 hole 1.1: 1(-3.81,0)
  round 1.699 hole 1.1: 2(-1.27,0) 3(1.27,0) 4(3.81,0)
  silkscreen extent -5.08,-1.27 5.08,1.27
HDR-TH_40P-P2.54-V-F-R2-C20-S2.54 [mil]
  rect 63x63 hole 39.4: 1(-950,-50)
  round 63 hole 39.4: 2(-950,50) 3(-850,-50) 4(-850,50) 5(-750,-50) 6(-750,50) 7(-650,-50) 8(-650,50) 9(-550,-50) 10(-550,50) 11(-450,-50) 12(-450,50) 13(-350,-50) 14(-350,50) 15(-250,-50) 16(-250,50) 17(-150,-50) 18(-150,50) 19(-50,-50) 20(-50,50) 21(50,-50) 22(50,50) 23(150,-50) 24(150,50) 25(250,-50) 26(250,50) 27(350,-50) 28(350,50) 29(450,-50) 30(450,50) 31(550,-50) 32(550,50) 33(650,-50) 34(650,50) 35(750,-50) 36(750,50) 37(850,-50) 38(850,50) 39(950,-50) 40(950,50)
  silkscreen extent -1005,-100 1005,100
IDC-TH_14P-P2.54-V-R2-C7-S2.54 [mm]
  rect 1.801x1.801 hole 1.1: 1(-7.62,-1.27)
  round 1.801 hole 1.1: 2(-7.62,1.27) 3(-5.08,-1.27) 4(-5.08,1.27) 5(-2.54,-1.27) 6(-2.54,1.27) 7(0,-1.27) 8(0,1.27) 9(2.54,-1.27) 10(2.54,1.27) 11(5.08,-1.27) 12(5.08,1.27) 13(7.62,-1.27) 14(7.62,1.27)
  silkscreen extent -12.98,-4.5 12.95,4.52
IND-SMD_L4.0-W4.0 [mil]
  rect 63x137.8 smd: 1(-63,0) 2(63,0)
  silkscreen extent -82,-82 82,82
L0805 [mil]
  rect 44.6x54.2 smd paste-3937 mask+2: 1(-38.1,0) 2(38,0)
  silkscreen extent -77,-40 73,40
LED0805-RD [mm]
  rect 1.001x1.25 smd: 1(-1.1,0) 2(1.1,0)
  silkscreen extent -2.1,-0.95 1.98,0.96
LED0805-RD_RED [mm]
  rect 1.001x1.25 smd: 1(-1.001,0) 2(0.998,0)
  silkscreen extent -2.1,-0.95 1.98,0.96
PAD0.8/1.6 [mm]
  round 1.6 hole 0.8: 1(0,0)
PAD-3.2/6.0#1 [mm]
  round 6 hole 3.2: 1(6.181,5)
PAD-3.2/6.0#2 [mm]
  round 6 hole 3.2: 1(6.181,-5)
PAD-3.2/6.0#3 [mm]
  round 6 hole 3.2: 1(1,8.151)
PAD-3.2/6.0#4 [mm]
  round 6 hole 3.2: 1(6.174,5.428)
PN0080A-MFG [mm]
  oval 1.45x0.3 smd: 1(-6.725,4.75) 2(-6.725,4.25) 3(-6.725,3.75) 4(-6.725,3.25) 5(-6.725,2.75) 6(-6.725,2.25) 7(-6.725,1.75) 8(-6.725,1.25) 9(-6.725,0.75) 10(-6.725,0.25) 11(-6.725,-0.25) 12(-6.725,-0.75) 13(-6.725,-1.25) 14(-6.725,-1.75) 15(-6.725,-2.25) 16(-6.725,-2.75) 17(-6.725,-3.25) 18(-6.725,-3.75) 19(-6.725,-4.25) 20(-6.725,-4.75) 41(6.725,-4.75) 42(6.725,-4.25) 43(6.725,-3.75) 44(6.725,-3.25) 45(6.725,-2.75) 46(6.725,-2.25) 47(6.725,-1.75) 48(6.725,-1.25) 49(6.725,-0.75) 50(6.725,-0.25) 51(6.725,0.25) 52(6.725,0.75) 53(6.725,1.25) 54(6.725,1.75) 55(6.725,2.25) 56(6.725,2.75) 57(6.725,3.25) 58(6.725,3.75) 59(6.725,4.25) 60(6.725,4.75)
  oval 0.3x1.45 smd: 21(-4.75,-6.725) 22(-4.25,-6.725) 23(-3.75,-6.725) 24(-3.25,-6.725) 25(-2.75,-6.725) 26(-2.25,-6.725) 27(-1.75,-6.725) 28(-1.25,-6.725) 29(-0.75,-6.725) 30(-0.25,-6.725) 31(0.25,-6.725) 32(0.75,-6.725) 33(1.25,-6.725) 34(1.75,-6.725) 35(2.25,-6.725) 36(2.75,-6.725) 37(3.25,-6.725) 38(3.75,-6.725) 39(4.25,-6.725) 40(4.75,-6.725) 61(4.75,6.725) 62(4.25,6.725) 63(3.75,6.725) 64(3.25,6.725) 65(2.75,6.725) 66(2.25,6.725) 67(1.75,6.725) 68(1.25,6.725) 69(0.75,6.725) 70(0.25,6.725) 71(-0.25,6.725) 72(-0.75,6.725) 73(-1.25,6.725) 74(-1.75,6.725) 75(-2.25,6.725) 76(-2.75,6.725) 77(-3.25,6.725) 78(-3.75,6.725) 79(-4.25,6.725) 80(-4.75,6.725)
  silkscreen extent -6.85,-5.6 5.6,5.6, body extent -7.5,-7.5 7.5,7.5, height 0.25
QFN-16_L3.0-W3.0-P0.50-TL-EP1.7 [mil]
  oval 33.5x11 smd paste-3937 mask+2: 1(-59,29.5) 2(-59,9.8) 3(-59,-9.8) 4(-59,-29.5) 9(59.1,-29.5) 10(59.1,-9.8) 11(59.1,9.8) 12(59.1,29.5)
  oval 11x33.5 smd paste-3937 mask+2: 5(-29.5,-59.1) 6(-9.8,-59.1) 7(9.9,-59.1) 8(29.5,-59.1) 13(29.5,59) 14(9.9,59) 15(-9.8,59) 16(-29.5,59)
  round 32.6 smd: 17(0.9,-0.9)
  Top Layer region: 33.5,33.5 33.5,-33.5 -33.5,-33.5 -33.5,16.7 -16.7,33.5 33.5,33.5
  silkscreen extent -94,-68 68,68
R0603#1 [mil]
  rect 31.8x34 smd paste-3937 mask+2: 1(-29.6,0) 2(29.7,0)
  silkscreen extent -54,-26 55,26, body extent -32,-16 32,16, height 18
R0603#2 [mil]
  rect 31.8x34 smd paste-3937 mask+2: 1(-29.6,0) 2(32.8,0)
  silkscreen extent -54,-26 55,26, body extent -32,-16 32,16, height 18
R0603#3 [mil]
  rect 31.8x34 smd paste-3937 mask+2: 1(-29.6,0) 2(26.6,0)
  silkscreen extent -55,-26 55,26, body extent -32,-16 32,16, height 18
SMB_L4.6-W3.6-LS5.3-RD [mil]
  rect 80.6x86.3 smd: 1(-92.9,0) 2(93,0)
  silkscreen extent -123,-77 108,77
SOIC-8_L4.9-W3.9-P1.27-LS6.0-BL [mm]
  oval 0.587x1.801 smd paste+0 mask+0.051: 1(-1.905,-2.601) 2(-0.635,-2.601) 3(0.635,-2.601) 4(1.905,-2.601) 5(1.905,2.598) 6(0.635,2.598) 7(-0.635,2.598) 8(-1.905,2.598)
  silkscreen extent -2.53,-1.52 2.52,1.52
SOP-8_L4.9-W3.9-P1.27-LS6.0-BL-1 [mm]
  oval 0.63x1.864 smd: 1(-1.905,-2.682) 2(-0.635,-2.682) 3(0.635,-2.682) 4(1.905,-2.682) 5(1.905,2.682) 6(0.635,2.682) 7(-0.635,2.682) 8(-1.905,2.682)
  silkscreen extent -2.82,-2.83 2.58,1.52
SOT-23-3_L2.9-W1.6-P1.90-LS2.8-BR [mm]
  rect 1.069x0.599 smd: 1(1.234,-0.95) 2(1.234,0.95) 3(-1.234,0)
  silkscreen extent -0.88,-1.54 0.88,1.54
SOT-23_L2.9-W1.3-P1.90-LS2.4-BR [mil]
  rect 39.4x31.5 smd: 1(45.2,-37.4) 2(45.2,37.4) 3(-45.3,0)
  silkscreen extent -28,-59 28,59
SW-SMD_4P-L6.0-W6.0-P4.50-LS9.0_H5.0 [mm]
  rect 2.301x1.501 smd: 1(-4.549,2.25) 2(4.549,2.25) 3(-4.549,-2.25) 4(4.549,-2.25)
  silkscreen extent -3,-3 3,3
SW-TH_6P-L8.0-W8.0-P2.50 [mil]
  rect 60x60 hole 39.4: 1(-98.4,-118.1)
  round 60 hole 39.4: 2(0,-118.1) 3(98.5,-118.1) 4(-98.4,118.2) 5(0,118.2) 6(98.5,118.2)
  silkscreen extent -157,-157 158,158
SW-TH_SS-12D10L5 [mil]
  oval 78.7x118.1 hole 51.2 slot 78.7 at 90 deg: 1(-185.1,0) 2(0,0) 3(185,0)
  silkscreen extent -250,-132 250,132
TP-1.5 [mm]
  round 1.5 / inner round 0 / far side round 0 all layers, no hole paste-2539.97 mask-2539.97: 1(0,0)
USB-C-SMD_SHOU_TYPE-C-16P-CB1.6 [mil]
  oval 39.4x66.9 hole 23.6 slot 43.3 at 90 deg paste-99999 mask+2: 25(221.2,56.1) 28(-221.3,56.1)
  oval 39.4x82.7 hole 23.6 slot 59.1 at 90 deg paste-99999 mask+2: 26(221.2,-101.3) 27(-221.3,-101.3)
  rect 11.8x43.3 smd paste-3937 mask+2: A1(-131.9,101.4) A4(-100.4,101.4) A5(-49.2,101.4) A6(-9.9,101.4) A7(9.8,101.4) A8(49.2,101.4) A9(100.4,101.4) A12(131.9,101.4) B1(120.1,101.4) B4(88.6,101.4) B5(68.9,101.4) B6(29.5,101.4) B7(-29.5,101.4) B8(-68.9,101.4) B9(-88.6,101.4) B12(-120.1,101.4)
  Keep-Out Layer lines w10: 179.1,-188 179.1,71.8 -175.3,71.8 -175.3,-188
  silkscreen extent -176,-184 176,72

## Part data
C9 C18 C19: library part C0603-10V/10uF, "0603,10V/10uF"
C10 C11 C12 C13 C14 C17 C20 C21 C22 C23 C45 C48 C51 C53: library part C0603-50V/104, "0603,50V/104"
C15 C16 C24: library part C0603-10V/2.2uF, "0603,10V/2.2uF"
C25 C26 C27 C28 C29 C30 C31 C32 C33 C34 C35 C36 C37 C38 C39 C40: library part C0603-50V/100pF, "0603,50V/100pF"
C41 C42: library part C0603-50V/10pF, "0603,50V/10pF,C0G/NP0"
C43: library part C0603-50V/1nF, "0603,50V/1nF"
C44: library part C0805-50V/10uF, "0805,50V/10uF,"
C46: library part C0603-50V/3.3nF, "0603,50V/3.3nF"
C47: library part C0603-10V/22uF, "0603,10V/22uF"
C49 C50: library part C0805-50V/2.2uF, "0805,50V/2.2uF,"
C52: library part C0805-25V/22uF, "0805,25V/22uF,"
D2 D3: "灯头类型:-;发光颜色:黄绿色;正向压降(Vf):1.6V~2.6V;功率:65mW;正向电流:25mA;波长:565nm~578nm;二极管配置:独立二极管;透镜颜色:-;色温:-;发光强度:55mcd;发光角度:130°;载带方式:-;工作温度:-30℃~+85℃;", Color Temperature=-, Forward Current=25mA, Illumination Color=黄绿色, JLCPCB Part Class="Extended Part", LCSC Part Name=片式发光二极管, Manufacturer=国星光电, ManufacturerPart=NCD0805C1, Operating Temperature=-30℃~+85℃, Power(Watts)=65mW, Voltage - Forward(Vf)=1.6V~2.6V, AddInBom=yes, ConvertToPcb=yes, Datasheet=https://item.szlcsc.com/datasheet/NCD0805C1/85426.html, Diode Configuration=独立二极管, FootprintName=LED0805-RD, Lamp Holder Type=-, Lens Color=-, Luminous Intensity=55mcd, ModelId=b1c5ed7a4f6e46d3bc6f6cc7c20f3fea, ModelName=LED0805-RD, ModelTransform=79.527,49.2125,0,0,0,0,0,0,0, Mounting Style=-, Peak Wavelength=576nm, Supplier=LCSC, Supplier Footprint=0805, SupplierPart=C84257, Symbol=FC-2012GHK-570A08, Viewing Angle=130°, Wavelength - Dominant=565nm~578nm
D4 LED0 LED1 LED2 LED3 LED4 LED5 LED6 LED7: "灯头类型:2mmx1.2mm方形灯头;发光颜色:红色;正向压降(Vf):2.3V;功率:50mW;正向电流:20mA;波长:615nm~630nm;二极管配置:独立二极管;透镜颜色:无色透明透镜;色温:-;发光强度:230mcd;发光角度:120°;载带方式:正贴;工作温度:-40℃~+85℃;", Color Temperature=-, Forward Current=20mA, Illumination Color=红色, JLCPCB Part Class="Extended Part", LCSC Part Name=0805红贴片式发光二极管, Lens Color=无色透明透镜, Manufacturer=XINGLIGHT(成兴光), ManufacturerPart=XL-2012SURC, Operating Temperature=-40℃~+85℃, Power(Watts)=50mW, Voltage - Forward(Vf)=2.3V, AddInBom=yes, ConvertToPcb=yes, Datasheet=https://item.szlcsc.com/datasheet/XL-2012SURC/1051421.html, Diode Configuration=独立二极管, FootprintName=LED0805-RD_RED, Lamp Holder Type=2mmx1.2mm方形灯头, Luminous Intensity=230mcd, ModelId=9e1095fac56a47ba900124c2261595bd, ModelName=LED0805-RD_RED, ModelTransform=79.527,49.2125,0,0,0,0,0,-0.004,0, Mounting Style=正贴, Peak Wavelength=620nm, Supplier=LCSC, Supplier Footprint=0805, SupplierPart=C965812, Symbol=XL-2012SURC, Viewing Angle=120°, Wavelength - Dominant=615nm~630nm
F1: "耐压(Vmax):24V;最大电流(Imax):100A;保持电流(Ihold):500mA;跳闸电流(Itrip):1A;", Current - Max=100A, Hold Current=500mA, JLCPCB Part Class="Extended Part", LCSC Part Name="0.50A  24V 自恢复保险丝", Manufacturer=台湾陆海, ManufacturerPart=nSMD050-24V, Power Dissipation=600mW, Resistance - Initial (Ri) (Min)=150mΩ, Resistance - Post Trip (R1) (Max)=700mΩ, Trip Current=1A, Voltage - Max=24V, AddInBom=yes, ConvertToPcb=yes, Datasheet=https://item.szlcsc.com/datasheet/nSMD050-24V/71171.html, FootprintName=F1206, Height=1.4mm, Length=3.5mm, ModelId=f1628daad26847a79b887277a2bc8541, ModelName=F1206_L3.2-W1.7-H0.6, ModelTransform=125.984,66.929,0,0,0,0,0,0,0, Supplier=LCSC, Supplier Footprint=1206, SupplierPart=C70076, Symbol=nSMD050-24V, Time to Trip(Max)=100ms, Width=1.8mm
J2: "插针结构:1x4P;间距:2.54mm;行距:-;圆针/方针:方针;安装方式:直插;排数:单排;总PIN位数:4P;额定电流:3A;额定电压:250V;配合针长度:6mm;塑高:2.5mm;端接针长度:3mm;触头材质:-;工作温度:-40℃~+105℃;颜色:黑色;", Color=黑色, Current Rating=3A, JLCPCB Part Class="Extended Part", LCSC Part Name="1x4P 间距:2.54mm 方针 直插", Manufacturer=XFCN(兴飞), ManufacturerPart=PZ254V-11-04P, Operating Temperature=-40℃~+105℃, Voltage Rating (Max)=250V, AddInBom=yes, Circluar Pins/Square Pins=方针, Contact Material=-, ConvertToPcb=yes, Datasheet=https://item.szlcsc.com/datasheet/PZ254V-11-04P/2801085.html, FootprintName=HDR-TH_4P-P2.54-V-M, Insulation Height=2.5mm, Length of End Connection Pin=3mm, Length of Mating Pin=6mm, ModelId=112f4d05e8d64e99ab9a333894bea4f9, ModelName=HDR-TH_4P-P2.54-M-LI-1X4P, ModelTransform=399.999,104.7242,0,0,0,0,0,0,-118.11, Mounting Type=直插, Number of Pins=4P, Number of Rows=单排, Pin Structure=1x4P, Pitch=2.54mm, Row Spacing=-, Supplier=LCSC, Supplier Footprint=插件,P=2.54mm, SupplierPart=C2691448, Symbol=PZ254V-11-04P_C2691448
J3: "结构:1x4P;间距:3.81mm;颜色:绿色;安装方式:直插;排数:1;每排PIN数:4;额定电流:10A;额定电压:300V;线规 - AWG:16~26;线规 - 平方毫米:1;工作温度:-40℃~+105℃;", Color=绿色, Current Rating=10A, JLCPCB Part Class="Extended Part", LCSC Part Name="1x4P 3.81mm 直插 排数:1 每排P数:4", Manufacturer=DORABO(地博电气), ManufacturerPart=DB125-3.81-4P-GN-S, Operating Temperature=-40℃~+105℃, Voltage Rating (Max)=300V, AddInBom=yes, ConvertToPcb=yes, Datasheet=https://item.szlcsc.com/datasheet/DB125-3.81-4P-GN-S/376627.html, FootprintName=CONN-TH_DB125-3.81-4P, ModelId=11e8572fb837469c9a45098d5493725c, ModelName=CONN-TH_DB3.81-LI-4P-125, ModelTransform=619.6736,291.338,0,180,0,0,11.811,-7.874,-157.48, Mounting Type=直插, Number of Pins=4P, Number of PINs Per Row=4, Number of Positions or Pins=1x4P, Number of Rows=1, Pitch=3.81mm, Screw Specification=M2, Supplier=LCSC, Supplier Footprint=插件,P=3.81mm, SupplierPart=C395880, Symbol=DB125-3.81-4P, Wire Gauge - AWG=16~26, Wire Gauge - mm2=1
J102: "连接器类型:简牛座;间距:2.54mm;结构:2x7P;安装方式:直插;行距:2.54mm;排数:2;每排PIN数:7;触头材质:黄铜;触头镀层:金;", JLCPCB Part Class="Extended Part", LCSC Part Name="2.54mm 2x7P 排数:2 每排P数:7", Manufacturer=BOOMELE(博穆精密), ManufacturerPart=2.54-2*7P简牛, AddInBom=yes, Connector Type=简牛座, Contact Material=黄铜, Contact Plating=金, ConvertToPcb=yes, Datasheet=https://item.szlcsc.com/datasheet/2.54-2*7P%25E7%25AE%2580%25E7%2589%259B/11764.html, FootprintName=IDC-TH_14P-P2.54-V-R2-C7-S2.54, Holder Type=直插, ModelId=1e191473481d43b08e40c7df32061c8c, ModelName=IDC-TH_14P-P2.54-V-R2-C7-S2.54, ModelTransform=999.998,348.41478,0,0,0,0,0,3.937,-118.11, Number of PINs Per Row=7, Number of Positions or Pins=2x7P, Number of Rows=2, Pitch=2.54mm, Row Spacing=2.54mm, Supplier=LCSC, Supplier Footprint=插件,P=2.54mm, SupplierPart=C11215, Symbol=HDR-IDC-2.54-2X7P
L2: library part 磁珠-60Ω@100MHz, "磁珠,60Ω@100MHz,3A,0805,CBW201209U600T,风华", Manufacturer="Wurth Elektronik", PartNumber=742792063, Supplier Part Number 1=732-1612-1-ND, Value1="0.025 ohm", Value2=3A, ValueDisplayed="60 ohm", ComponentLink1Description="Datasheet link", ComponentLink1URL=http://katalog.we-online.de/pbs/datasheet/742792063.pdf, CompType="Ferrite Bead", DCR_ohm=0.025, Imax_A=3A, LatestRevisionDate=2017-03-09, MountType=SMT, PackageReference=0805, Published=2014-04-30, Publisher="Texas Instruments", RoHS=Y, SizeArea_mm2=2.5, SizeAreaWB_mm2=6.75, SizeX_mm=2, SizeY_mm=1.25, SizeZ_mm=1.45, Supplier 1=Digi-Key, Supplier 2=Mouser, Supplier Part Number 2=710-742792063, Ztyp@1GHz_Ohm=95.384, ZTyp@100MHz_Ohm=60
L3: library part 磁珠-220Ω-100MHz-2A, "磁珠 220Ω @ 100 MHz, 2 A, 0805,BLM21PG221SN1D，村田", Manufacturer="Wurth Elektronik", PartNumber=742792022, Supplier Part Number 1=732-1614-1-ND, Value1="0.05 ohm", Value2=2A, ValueDisplayed="220 ohm", ComponentLink1Description="Datasheet link", ComponentLink1URL=http://katalog.we-online.de/pbs/datasheet/742792022.pdf, CompType="Ferrite Bead", DCR_ohm=0.05, Imax_A=2A, LatestRevisionDate=2017-03-09, MountType=SMT, PackageReference=0805, Published=2014-04-30, Publisher="Texas Instruments", RoHS=Y, SizeArea_mm2=2.5, SizeAreaWB_mm2=6.75, SizeX_mm=2, SizeY_mm=1.25, SizeZ_mm=1.45, Supplier 1=Digi-Key, Supplier 2=Mouser, Supplier Part Number 2=710-742792022, Ztyp@1GHz_Ohm=190.289, ZTyp@100MHz_Ohm=220
L4: "电感值:3.3uH;精度:±20%;额定电流:4A;饱和电流(Isat):5.9A;类型:绕线电感;", Current - Saturation(Isat)=5.9A, Current Rating=4A, DC Resistance(DCR)=73mΩ, JLCPCB Part Class="Extended Part", LCSC Part Name="3.3uH ±20% 5.9A", Manufacturer=cjiang(长江微电), ManufacturerPart=FHD4020S-3R3MT, Tolerance=±20%, AddInBom=yes, ConvertToPcb=yes, Datasheet=https://atta.szlcsc.com/upload/public/pdf/source/20200609/C601990_BCEA243EC4DA0A9A288AA78A6DFB48A5.pdf, FootprintName=IND-SMD_L4.0-W4.0, ModelId=45bc3737ecfd4f3bb122605ee525b018, ModelName=IND-SMD_L4.0-W4.0-H1.9, ModelTransform=157.48,157.484,0,0,0,0,0,0,0, Supplier=LCSC, Supplier Footprint=SMD,4x4mm, SupplierPart=C602030, Symbol=FHD4020S-3R3MT, Type=绕线电感
P1: "插孔结构:2x20P;间距:2.54mm;行距:2.54mm;圆孔/方孔:方孔;安装方式:直插;排数:双排;总孔位数:40P;额定电流:3A;额定电压:-;插孔方向:顶部;塑高:8.5mm;触头材质:黄铜;触头镀层:金;工作温度:-40℃~+105℃;", Current Rating=3A, JLCPCB Part Class="Extended Part", LCSC Part Name="2x20P 间距:2.54mm 直插", Manufacturer=Megastar(兆星), ManufacturerPart=ZX-PM2.54-2-20PY, Operating Temperature=-40℃~+105℃, Voltage Rating (Max)=-, AddInBom=yes, Circular Hole / Square Hole=方孔, Contact Material=黄铜, Contact Plating=金, ConvertToPcb=yes, Datasheet=https://item.szlcsc.com/datasheet/ZX-PM2.54-2-20PY/8574015.html, FootprintName=HDR-TH_40P-P2.54-V-F-R2-C20-S2.54, Holes Direction=顶部, Holes Structure=2x20P, Insulation Height=8.5mm, ModelId=6c85b3860eb24e43a9d123684eb6d3ee, ModelName=HDR-TH_40P-P2.54-F-LI-2X20P, ModelTransform=2015.783,196.85,0,0,0,0,0,0,-125.984, Mounting Type=直插, Number of Positions=40P, Number of Rows=双排, PIN Length=3.2mm, Pitch=2.54mm, Row Spacing=2.54mm, Supplier=LCSC, Supplier Footprint=插件,P=2.54mm, SupplierPart=C7499354, Symbol=ZX-PM2.54-2-20PY
Q1: "数量:1个P沟道;漏源电压(Vdss):30V;连续漏极电流(Id):4.3A;导通电阻(RDS(on)):48mΩ@10V;耗散功率(Pd):-;阈值电压(Vgs(th)):2.5V@250uA;", Current - Continuous Drain(Id)=4.3A, Drain to Source Voltage=30V, Gate Threshold Voltage (Vgs(th))=2.5V@250uA, Input Capacitance(Ciss)=830pF, JLCPCB Part Class="Extended Part", LCSC Part Name="1个P沟道 耐压:30V 电流:4.3A", Manufacturer=AOS, ManufacturerPart=AO3407A, Operating Temperature=-, Reverse Transfer Capacitance (Crss@Vds)=92pF@15V, AddInBom=yes, Configuration=-, ConvertToPcb=yes, Datasheet=https://item.szlcsc.com/datasheet/AO3407A/15829.html, FootprintName=SOT-23-3_L2.9-W1.6-P1.90-LS2.8-BR, Gate Charge(Qg)=16nC@10V, ModelId=89cb27a44ab2466697082bb9fd73a7d0, ModelName=SOT-23-3L_L2.9-W1.6-H1.1-LS2.8-P0.95, ModelTransform=114.173,110.236,0,90,0,0,0,0,0, Number=1个P沟道, Output Capacitance(Coss)=-, Pd - Power Dissipation=-, RDS(on)=48mΩ@10V, Supplier=LCSC, Supplier Footprint=SOT-23, SupplierPart=C15155, Symbol=AO3407A, Type=-
R10 R11: library part R0603-2.2k, "0603,2.2k"
R12 R13 R14 R15 R16 R17 R18 R19 R20 R21 R22 R23 R24 R25 R26 R27 R70 R71: library part R0603-22Ω, "0603,22Ω"
R58 R59 R63 R72 R83 R84: library part R0603-10k, "0603,10k"
R60 R61 R62: library part R0603-100Ω, "0603,100Ω"
R64 R74: library part R0603-100k, "0603,100k"
R65 R87 R88: library part R0603-5.1k, "0603,5.1k"
R66: library part R0603-16k, "0603,16k"
R67 R68: library part R0603-4.7k, "0603,4.7k"
R69 R75 R76 R77 R78 R79 R80 R81 R82 R85 R86: library part R0603-1k, "0603,1k"
R73: library part R0603-120Ω, "0603,120Ω"
R89: library part R0603-4.3k, "0603,4.3k"
R90: library part R0603-2k, "0603,2k"
R91: library part R0603-1Meg, "0603,1Meg"
S1 S2 S11 S12: "电路结构:单刀单掷;按钮形状:圆形按钮;安装方式:立贴;开关长度:6mm;开关宽度:6mm;开关高度:5mm;带支架:不带支架;触点电流:50mA;额定电压:12V;工作寿命:8万次;", Actuator/Cap Color=黑色, Contact Current=50mA, JLCPCB Part Class="Extended Part", LCSC Part Name="6*6*5mm 立贴 轻触开关", Manufacturer=kinghelm(金航标), ManufacturerPart=KH-6X6X5H-STM, Voltage Rating=12V, Actuator Style=圆形按钮, AddInBom=yes, Circuit=单刀单掷, ConvertToPcb=yes, Datasheet=https://item.szlcsc.com/datasheet/KH-6X6X5H-STM/3009601.html, FootprintName=SW-SMD_4P-L6.0-W6.0-P4.50-LS9.0_H5.0, Length=6mm, Life=8万次, ModelId=46371efb35684031937580a0045530ec, ModelName=SW-SMD_4P-L6.0-W6.0-P4.50-LS9.0_H5.0, ModelTransform=354.33,236.25937,0,0,0,0,0,0,0, Mounting Type=立贴, Supplier=LCSC, Supplier Footprint=SMD-4P,6x6mm, SupplierPart=C2837531, Switch Height=5mm, Symbol=KH-6X6X5H-STM, Termination Style=鸥翼型, Width=6mm, with Bracket=不带支架
S3 S4: "电路结构:单刀双掷;安装方式:直插;开关颜色:黑色;额定电流:3A;额定电压:125V;工作寿命:1万次;", Actuator Color=黑色, Current Rating=3A, JLCPCB Part Class="Extended Part", LCSC Part Name="柄长5mm 直插双档 滑动开关", Manufacturer="XKB Connection(中国星坤)", ManufacturerPart=SS-12D10L5, Operating Temperature=-40℃~+85℃, Voltage Rating=125V, Actuator Style=矩形柱状, AddInBom=yes, Circuit=单刀双掷, ConvertToPcb=yes, Datasheet=https://item.szlcsc.com/datasheet/SS-12D10L5/300104.html, FootprintName=SW-TH_SS-12D10L5, Length=13mm, Life=1万次, ModelId=c49f07a32c154ec8ad7cf47670a53981, ModelName=SW-TH_L13.0-W6.8-H6.4-P4.7, ModelTransform=511.81394,267.716,0,0,0,0,0,0,-220.472, Mounting Type=直插, Supplier=LCSC, Supplier Footprint=插件,13x6.8mm, SupplierPart=C319012, Switch Height=6.4mm, Symbol=SS-12D10L5, Termination Style=PC引脚, Width=6.8mm
S5: "自锁/无锁:自锁;安装方式:直插;触点电流:100mA;额定电压:30V;带灯:不带;作用力:1.6N;工作寿命:10万次;", Actuator/Cap Color=蓝色, Contact Current=100mA, IP Rating=-, JLCPCB Part Class="Extended Part", LCSC Part Name="8*8 蓝白黑 自锁开关", Manufacturer="XKB Connection(中国星坤)", ManufacturerPart=XKB8080-Z, Operating Force=1.6N, Operating Temperature=-15℃~+55℃, Voltage Rating=30V, Actuator Style=矩形按钮, AddInBom=yes, ConvertToPcb=yes, Datasheet=https://item.szlcsc.com/datasheet/XKB8080-Z/299952.html, FootprintName=SW-TH_6P-L8.0-W8.0-P2.50, Life=10万次, ModelId=2ca63b555ed647238a13c4f5c2920312, ModelName=SW-TH_L8.0-W8.0-H13.7-P2.5, ModelTransform=314.96,314.96,0,90,0,0,0,0,-125.984, Mounting Type=直插, Self Lock / No Lock=自锁, Supplier=LCSC, Supplier Footprint=插件, SupplierPart=C318860, Symbol=XKB8080-Z, Termination Style=PC引脚, With Lamp=不带
TV1: "极性:单向;反向截止电压(Vrwm):15V;钳位电压:24.4V;峰值脉冲电流(Ipp):24.6A;峰值脉冲功率(Ppp):600W;击穿电压(VBR):16.7V;", Clamping Voltage=24.4V, JLCPCB Part Class="Extended Part", LCSC Part Name="单向TVS 15V截止 峰值浪涌电流：24.6A", Manufacturer=Littelfuse(美国力特), ManufacturerPart=SMBJ15A, Operating Temperature=-65℃~+150℃, Peak Pulse Current (Ipp)=24.6A, Peak Pulse Power Dissipation (Ppp)=600W, Reverse Leakage Current (Ir)=1uA, Reverse Stand-Off Voltage (Vrwm)=15V, Voltage - Breakdown=16.7V, AddInBom=yes, ConvertToPcb=yes, Datasheet=https://item.szlcsc.com/datasheet/SMBJ15A/85013.html, FootprintName=SMB_L4.6-W3.6-LS5.3-RD, level of protection="IEC 61000-4-4；IEC 61000-4-2", ModelId=5e8926c661484ff2a35b83e5ae62aeb9, ModelName=SMB_L4.6-W3.6-LS5.3-RD, ModelTransform=212.598,141.732,0,0,0,0,0,0,0, Polarity=单向, Supplier=LCSC, Supplier Footprint=DO-214AA, SupplierPart=C83846, Symbol=SMBJ15A_C83846, Type=TVS
TV2: "极性:双向;反向截止电压(Vrwm):24V;钳位电压:70V;峰值脉冲电流(Ipp):3A@8/20us;峰值脉冲功率(Ppp):200W@8/20us;击穿电压(VBR):27.8V;", Clamping Voltage=70V, JLCPCB Part Class="Extended Part", Junction Capacitance=11pF, LCSC Part Name="双向ESD 24V截止 峰值脉冲电流：3A@8/20us", Manufacturer=Nexperia(安世), ManufacturerPart=PESD1CAN,215, Operating Temperature=-65℃~+150℃, Peak Pulse Current (Ipp)=3A@8/20us, Peak Pulse Power Dissipation (Ppp)=200W@8/20us, Reverse Leakage Current (Ir)=1nA, Reverse Stand-Off Voltage (Vrwm)=24V, Voltage - Breakdown=27.8V, AddInBom=yes, ConvertToPcb=yes, Datasheet=https://item.szlcsc.com/datasheet/PESD1CAN%252C215/16453.html, FootprintName=SOT-23_L2.9-W1.3-P1.90-LS2.4-BR, level of protection="IEC 61000-4-5；IEC 61000-4-2", ModelId=c62791f0466c4ae2a892c056b845b0ca, ModelName=SOT-23-3P_L2.9-W1.3-H1.0-LS2.4-P0.95, ModelTransform=98.64468,114.173,0,180,0,0,0.001,-0.002,0, Number of Channels=双路, Polarity=双向, Supplier=LCSC, Supplier Footprint=SOT-23, SupplierPart=C15771, Symbol=PESD1CAN,215, Type=ESD
U1: library part SYM-TMS320F280025CPNSR, "32-bit MCU with 100 MHz, FPU, TMU, 128-KB flash, CLB 80-LQFP -40 to 125", Frequency_Fixed=100MHz, Manufacturer="Texas Instruments", Max Supply Voltage=3.63V, Min Supply Voltage=2.8V, Operating Temperature Range="-40°C to +125°C", AEC Category=Q200, AEC Qualified=No, ComponentLink1Description="Datasheet Link", ComponentLink1URL=http://www.ti.com/lit/ds/symlink/GPN.pdf, ComponentLink2Description="Product Folder", ComponentLink2URL=http://www.ti.com/product/GPN, ComponentLink3Description="Online Datasheet", ComponentLink3URL=http://www.ti.com/product/GPN/datasheet, CompType=IC, Core Architecture=TMS320C28x, Data Bus Width=32bits, Datasheet Path=datasheets/IC-TMS320F280025CPNSR.pdf, helpURL=https://upverter.com/upn/revision/e6f10be0003e77e0/, Interface=I2C,SPI,UART,CAN,LIN,SCI,Other, Memory Size=128KBytes, Memory Type=FLASH, Number Of A/D Converters=2, Number Of Adc Channels=16, Number Of Cores=1, Number Of I2C Channels=2, Number Of I/Os=43, Number Of Pwm Channels=14, Number Of Spi Channels=2, Number Of Timers/Counters=3, Number Of Uart Channels=1, PackageReference=LQFP80, Part Number=TMS320F280025CPNSR, PartId=1, PartNumber=TMS320F280025CPNSR, Ram Size=24KBytes, RoHS=UNKNOWN, SizeZ_mm=1.6mm, Standoff Height=0.05mm, TaMax_C=+125°C, TaMin_C=-40°C, TJmax_C=+125°C
U2: "功能类型:降压型;工作电压:3V~17V;输出电压:900mV~6V;输出电流:3A;输出类型:可调;", Frequency - Switching=2.5MHz, JLCPCB Part Class="Extended Part", LCSC Part Name="降压型 3A 3V~17V", Manufacturer=TI(德州仪器), ManufacturerPart=TPS62130RGTR, Operating Temperature=-40℃~+85℃@(TA), Output Current=3A, Output Voltage=900mV~6V, Quiescent Current=17uA, Voltage - Supply=3V~17V, AddInBom=yes, ConvertToPcb=yes, Datasheet=https://www.ti.com/cn/lit/ds/symlink/tps62130.pdf, Features=轻载高效模式；可调软启动；过流保护；输出电压跟随；工作状态指示, FootprintName=QFN-16_L3.0-W3.0-P0.50-TL-EP1.7, Function=降压型, ModelId=4b11d3b5aea64910b85c54184b64922e, ModelName=QFN-16_L3.0-W3.0-P0.50-EP1.7, ModelTransform=118.8974,118.8974,0,0,0,0,0,0,0, Number of Outputs=1, Output Type=可调, Supplier=LCSC, Supplier Footprint=QFN-16-EP(3x3), SupplierPart=C43590, Switch tube (built-in/external)=内置, Symbol=TPS62130RGTR, Synchronous Rectifier=是, Topology=降压式
U3: "接口类型:I2C;存储容量:64Kbit;时钟频率(fc):400kHz;", Clock Frequency=400kHz, JLCPCB Part Class="Extended Part", LCSC Part Name="64K I²C 串行 EEPROM", Manufacturer=MICROCHIP(美国微芯), ManufacturerPart=24LC64T-I/SN, Operating Temperature=-40℃~+85℃, Voltage - Supply=2.5V~5.5V, AddInBom=yes, ConvertToPcb=yes, Data Retention - TDR (Year)=200年, Datasheet=https://item.szlcsc.com/datasheet/24LC64T-I%252FSN/5911.html, Features=噪声抑制功能；硬件写保护功能, FootprintName=SOIC-8_L4.9-W3.9-P1.27-LS6.0-BL, Interface=I2C, Memory Size=64Kbit, ModelId=e81d2f7d937b4a6ab1dca543ff5d56a4, ModelName=SOIC-8_L4.9-W3.9-H1.7-LS6.0-P1.27, ModelTransform=192.913,236.22,0,0,0,0,0,0,0, Supplier=LCSC, Supplier Footprint=SOIC-8, SupplierPart=C5460, Symbol="24LC64T-I/SN SOP-8", Write Cycle Endurance=100万次, Write Cycle Time(Tw)=5ms
U4: "类型:CAN-FD收发器;数据速率:5Mbps;", Current - Supply=42mA, JLCPCB Part Class="Extended Part", LCSC Part Name="TCAN3413 3.3-V CAN FD 收发器", Manufacturer=TI(德州仪器), ManufacturerPart=TCAN3413DR, Operating Temperature=-40℃~+125℃, Supply Current (Iq)=4uA, Voltage - Supply=3V~3.6V, AddInBom=yes, ConvertToPcb=yes, Data Rate=5Mbps, Datasheet=https://www.ti.com.cn/cn/lit/ds/symlink/tcan3413.pdf?ts=1739433172079&ref_url=https%253A%252F%252Fwww.ti.com.cn%252Fsitesearch%252Fzh-cn%252Fdocs%252Funiversalsearch.tsp%253FlangPref%253Dzh-CN%2526nr%253D19%2526searchTerm%253DTCAN3413DR, FootprintName=SOP-8_L4.9-W3.9-P1.27-LS6.0-BL-1, ModelId=75c24a7891ee4dd6bdac16a7163ff87e, ModelName=SOP-8_L4.9-W3.9-P1.27-LS6.0-BL-1, ModelTransform=192.913,236.22,0,0,0,0,0,0,0, Supplier=LCSC, Supplier Footprint=SOIC-8, SupplierPart=C22433320, Symbol=TCAN3413DR, Type=CAN-FD收发器
USB1: "连接器类型:Type-C;协议标准:USB 3.1;公母:母;安装方式:沉板;触点数量:16P;端口数量:1;额定电流 - 电源:3A;工作温度:-25℃~+85℃;", Current Rating-Power=3A, Detection color=黑色, JLCPCB Part Class="Extended Part", LCSC Part Name=16P沉板母座, Manufacturer="SHOU HAN(首韩)", ManufacturerPart="TYPE-C 16P CB1.6 073", Operating Temperature=-25℃~+85℃, Voltage Rating=5V, AddInBom=yes, Connect-Disconnect Life=5千次, Connector Type=Type-C, ConvertToPcb=yes, Datasheet=https://item.szlcsc.com/datasheet/TYPE-C%252016P%2520CB1.6%2520073/3179000.html, FootprintName=USB-C-SMD_SHOU_TYPE-C-16P-CB1.6, Gender=母, ModelId=26f34bb6c6bf4f1dbd42510d10f41fd6, ModelName=USB-C-SMD_SHOU_TYPE-C-16P-CB1.6, ModelTransform=454.33,283.464,0,0,0,0,0,-42.322,-62.992, Mounting Type=沉板, Number of Contacts=16P, Number of Ports=1, Protocol Standard="USB 3.1", Supplier=LCSC, Supplier Footprint=SMD, SupplierPart=C2906290, Symbol="TYPE-C 16P CB1.6 073"
Y2: library part 晶振-20M-X322520MSB4SI, "20M,X322520MSB4SI,扬兴,SMD3225-4P,常温频差:±10ppm;负载电容:20pF;频率稳定度:±20ppm;", Digikey Part Number=XC1841CT-ND, Frequency Stability=10ppm, Frequency_Fixed=20MHz, Load Capacitance=8pF, Manufacturer="ECS International", Mouser Part Number=520-200-8-30B-CKM, Operating Temperature Range="-20°C to +70°C", Part Number=ECS-200-8-30B-CKM, AEC Qualified=No, ComponentLink1Description=Datasheet, ComponentLink1URL=https://ecsxtal.com/store/pdf/ecx_53b.pdf, Datasheet=https://ecsxtal.com/store/pdf/ecx_53b.pdf, Datasheet Path=datasheets/Crys-ECS-200-8-30B-CKM.pdf, Digikey Description="CRYSTAL 20.0000MHZ 8PF SMD", Esr=40, Frequency Tolerance=10ppm, helpURL=https://upverter.com/upn/revision/b9ae4a09c701963d/, Lead Free=Yes, Mouser Description="Crystals 20.000MHZ 8pF 10ppm -20C +70C", PackageReference=SMD4, PartNumber=ECS-200-8-30B-CKM, RoHS=TRUE, Series=ECX-53B, SizeZ_mm=0.85mm, Supplier 1=Digikey, Supplier 2=Mouser, Supplier Part Number 1=XC1841CT-ND, Supplier Part Number 2=520-200-8-30B-CKM, Tolerance_%=10ppm

## Via types
v1: diameter 0.559, hole 0.254, Top Layer to Bottom Layer, 173 vias

## Nets (pads, with @x,y where several pads share a name; then routed paths per layer and width w, separated by ;. In a path a pad name is that pad's centre, name@x,y a point inside that pad or via, vN(x,y) a via of type N, cw(c..) or ccw(c..) an arc to the next point about the centre after c; other vN are vias at no path point)
+3V3: C16.1 C18.1 C47.1 L2.2 L3.1 L4.2 P1.5 R10.2 R11.2 R58.2 R59.2 R60.2 R61.2 R62.1 R63.2 R64.2 R66.2 R69.2 TP17.1 TP56.1 TP117.1 U2.14 | length 32
  Top Layer w0.254: U2.14@70.209,26.373 70.213,26.368 70.967,26.368 71.041,26.294 v1(71.123,26.294) ; 72.52,34.676 TP56.1@74.044,34.676
  Top Layer w0.508: v1(17.783,47.63) R60.2@17.783,48.781 ; v1(19.942,24.897) 19.952,24.907 20.986,24.907 R63.2@21.004,24.925 ; v1(23.882,36.33) 23.884,36.329 24.909,36.329 R10.2@24.91,36.327 ; R58.2@24.91,34.93 R10.2@24.91,36.327 ; R59.2@24.91,37.724 R10.2@24.91,36.327 ; R61.2@35.926,55.504 R62.1@35.926,56.901 v1(37.087,56.901) ; L2.2@41.832,44.671 41.954,44.671 42.266,44.983 42.266,45.105 42.632,45.471 C16.1@43.754,45.471 43.704,45.521 43.704,46.608 v1(43.694,46.617) ; R11.2@52.827,25.659 v1(53.978,25.659) ; C18.1@54.486,29.405 54.486,28.389 53.996,27.899 53.874,27.899 53.562,27.587 L3.1@53.562,27.465 53.685,27.341 53.685,25.966 53.978,25.673 v1(53.978,25.659) ; TP17.1@55.248,24.897 54.98,24.897 54.227,25.649 53.988,25.649 v1(53.978,25.659) ; R64.2@65.916,31.951 R69.2@65.916,33.482 ; TP117.1@77.981,10.038 P1.5@79.886,10.038
  PWR w0.508: 20.574,36.322 20.582,36.33 v1(23.882,36.33) ; v1(53.978,25.659) 55.128,25.659 56.149,24.638 57.15,24.638
  other v1: 71.123,25.532 65.916,35.057 66.678,35.057 67.44,35.057 68.202,35.057 68.964,35.057 69.726,35.057 70.488,35.057 71.25,35.057 72.012,35.057 72.774,35.057
+12V: C44.1 C45.1 S4.2 TP93.1 U2.10 U2.11 U2.12 U2.13 | length 6.4
  Top Layer w0.254: U2.10@68.461,25.123 68.461,24.425 v1@68.71,24.176 ; U2.11@68.959,25.123 68.959,24.425 v1@68.71,24.176 ; U2.12@69.459,25.123 69.464,25.118 69.464,24.143 v1(69.472,24.135) ; U2.13@70.209,25.875 70.221,25.863 70.221,24.91 v1(70.234,24.897) v1(70.234,24.135) v1(69.472,24.135) ; v1@68.71,24.176 v1(68.71,24.135) v1(69.472,24.135)
  other v1: 70.996,24.135 71.758,24.135
ADCINA4/C14: R16.2 TP36.1 | length 1.8
  Top Layer w0.254: TP36.1@41.913,51.694 41.913,49.972 R16.2@41.959,49.926
ADCINA7/C3: R19.2 TP43.1 | length 1.7
  Top Layer w0.254: R19.2@35.436,43.947 TP43.1@35.436,45.616
ADCINA8/C11: R20.2 TP44.1 | length 1.7
  Top Layer w0.254: R20.2@32.388,43.965 TP44.1@32.388,45.616
ADCINA9/C8: R21.2 TP45.1 | length 1.8
  Top Layer w0.254: TP45.1@38.865,51.694 38.865,49.99 R21.2@38.911,49.944
ADCINA10/C10: R22.2 TP46.1 | length 1.8
  Top Layer w0.254: TP46.1@35.817,51.694 35.817,49.972 R22.2@35.863,49.926
ADCINA12/C1: R24.2 TP48.1 | length 1.5
  Top Layer w0.254: R24.2@48.563,43.957 TP48.1@48.563,45.499
CANA_RX: R70.2 TP102.1 U1.60 | length 11.3
  Top Layer w0.254: R70.2@23.163,20.861 TP102.1@24.768,20.861 ; TP102.1@24.768,21.087 24.887,21.087 25.522,21.722 29.594,21.722 32.275,24.403 U1.60@32.275,25.25
CANA_TX: R71.2 TP103.1 U1.61 | length 13.3
  Top Layer w0.254: R71.2@23.163,19.464 23.163,19.492 23.615,19.944 TP103.1@26.927,19.944 ; TP103.1@26.927,20.579 TP103.1@26.927,19.944 ; U1.61@34.25,23.275 31.909,23.275 28.578,19.944 TP103.1@26.927,19.944
CANH: J3.2 R73.2 TP98.1 TV2.2 U4.7 | length 17.3
  Top Layer w0.508: J3.2@0.684,24.925 1.223,24.925 1.759,24.389 2.543,24.389 4.448,22.484 4.448,20.921 6.375,18.994 TV2.2@6.475,18.994 ; TP98.1@6.48,17.277 6.477,17.28 6.477,18.991 TV2.2@6.475,18.994 ; U4.7@12.734,19.464 12.71,19.441 10.94,19.441 R73.2@10.844,19.345 10.71,19.211 9.583,19.211 9.366,18.994 TV2.2@6.475,18.994
CANL: J3.3 R73.1 TP99.1 TV2.1 U4.6 | length 16.6
  Top Layer w0.508: J3.3@0.684,28.735 5.718,23.701 TP99.1@5.718,22.484 5.908,22.294 5.908,21.461 6.229,21.14 6.229,21.04 6.375,20.894 TV2.1@6.475,20.894 6.496,20.872 10.822,20.872 R73.1@10.844,20.851 10.938,20.757 12.71,20.757 U4.6@12.734,20.734
EH: USB1.25 USB1.26 USB1.27 USB1.28
ENABLE: C43.1 R63.1 S2.1 S2.2 S3.2 TP57.1 U1.59 | length 35.8
  Top Layer w0.254: TP57.1@8.385,32.644 8.399,32.658 12.989,32.658 S3.2@13.003,32.672 ; R63.1@22.51,24.925 22.464,24.879 C43.1@22.464,23.528 22.464,23.478 22.738,23.205 22.787,23.205 23.636,22.357 27.308,22.357 30.701,25.75 U1.59@32.275,25.75
  Top Layer w0.508: S3.2@13.003,32.672 15.779,32.672 16.513,33.406 16.513,37.934 16.811,38.232 21.444,38.232 21.742,37.934 21.742,37.083 S2.1@22.238,36.586 ; S2.2@22.238,27.488 22.374,27.352 22.374,25.061 R63.1@22.51,24.925
EPWM-1A: P1.11 TP105.1 U1.1 | length 50.7
  Top Layer w0.254: v1(44.453,25.278) 44.458,25.273 45.115,25.273 45.138,25.25 U1.1@45.725,25.25
  Bottom Layer w0.254: v1(44.453,25.278) 46.231,25.278 46.866,24.643 51.492,24.643 51.873,24.262 51.873,18.874 53.724,17.023 69.853,17.023 71.685,18.855 78.689,18.855 P1.11@79.886,17.658 81.013,16.531 83.966,16.531 TP105.1@85.093,17.658
EPWM-1B: P1.13 TP106.1 U1.2 | length 48.2
  Top Layer w0.254: U1.2@45.725,25.75 47.029,25.75 v1(47.501,25.278)
  Bottom Layer w0.254: v1(47.501,25.278) 51.946,25.278 52.327,24.897 52.327,19.182 53.978,17.531 69.599,17.531 71.377,19.309 78.997,19.309 P1.13@79.886,20.198 80.121,19.963 81.067,19.963 81.959,19.071 83.966,19.071 TP106.1@85.093,20.198
EPWM-3A: P1.9 TP109.1 U1.79 | length 48.7
  Top Layer w0.254: v1(43.183,21.722) 43.241,21.78 43.241,23.266 U1.79@43.25,23.275
  Bottom Layer w0.254: v1(43.183,21.722) 50.911,21.722 51.419,21.214 51.419,18.566 53.47,16.515 69.853,16.515 71.25,15.118 P1.9@79.87,15.118 ; P1.9@79.886,15.118 80.121,14.883 81.067,14.883 81.959,13.991 83.966,13.991 TP109.1@85.093,15.118
EPWM-3B: P1.7 TP110.1 U1.78 | length 52.9
  Top Layer w0.254: U1.78@42.75,23.275 42.759,23.284 42.759,24.473 v1(42.802,24.516)
  Bottom Layer w0.254: v1(42.802,24.516) 42.802,22.988 42.53,22.715 42.53,21.363 42.932,20.96 50.457,20.96 50.965,20.452 50.965,18.258 53.216,16.007 69.599,16.007 70.996,14.61 77.854,14.61 P1.7@79.886,12.578 81.013,11.451 83.966,11.451 TP110.1@85.093,12.578
EPWM-7A: P1.17 TP107.1 U1.4 | length 50.2
  Top Layer w0.254: U1.4@45.725,26.75 47.217,26.75 47.419,26.548 v1(47.501,26.548)
  Bottom Layer w0.254: v1(47.501,26.548) 52.835,26.548 53.372,26.011 53.372,19.541 54.322,18.591 69.155,18.591 74.826,24.262 78.87,24.262 P1.17@79.886,25.278 80.121,25.043 81.067,25.043 81.959,24.151 83.966,24.151 TP107.1@85.093,25.278
EPWM-7B: P1.15 TP108.1 U1.3 | length 52.6
  Top Layer w0.254: v1(44.453,26.294) 44.488,26.259 45.716,26.259 U1.3@45.725,26.25
  Bottom Layer w0.254: v1(44.453,26.294) 45.828,26.294 46.209,25.913 52.454,25.913 52.835,25.532 52.835,19.436 54.232,18.039 69.345,18.039 75.06,23.754 78.87,23.754 P1.15@79.886,22.738 81.013,21.611 83.966,21.611 TP108.1@85.093,22.738